# Altium PCB testDEOP.PcbDoc
Units mm, origin at the board's own origin, x right, y up, seen from the top; angles counter-clockwise.
Board outline 40 x 40 mm, 4 copper layers (Top Layer, Middle Layer, GND, Bottom Layer), stack 0.603 mm thick; 70 components, 53 nets, 255 pads, 132 vias.
Unrouted connection lines stored in the file: 1.
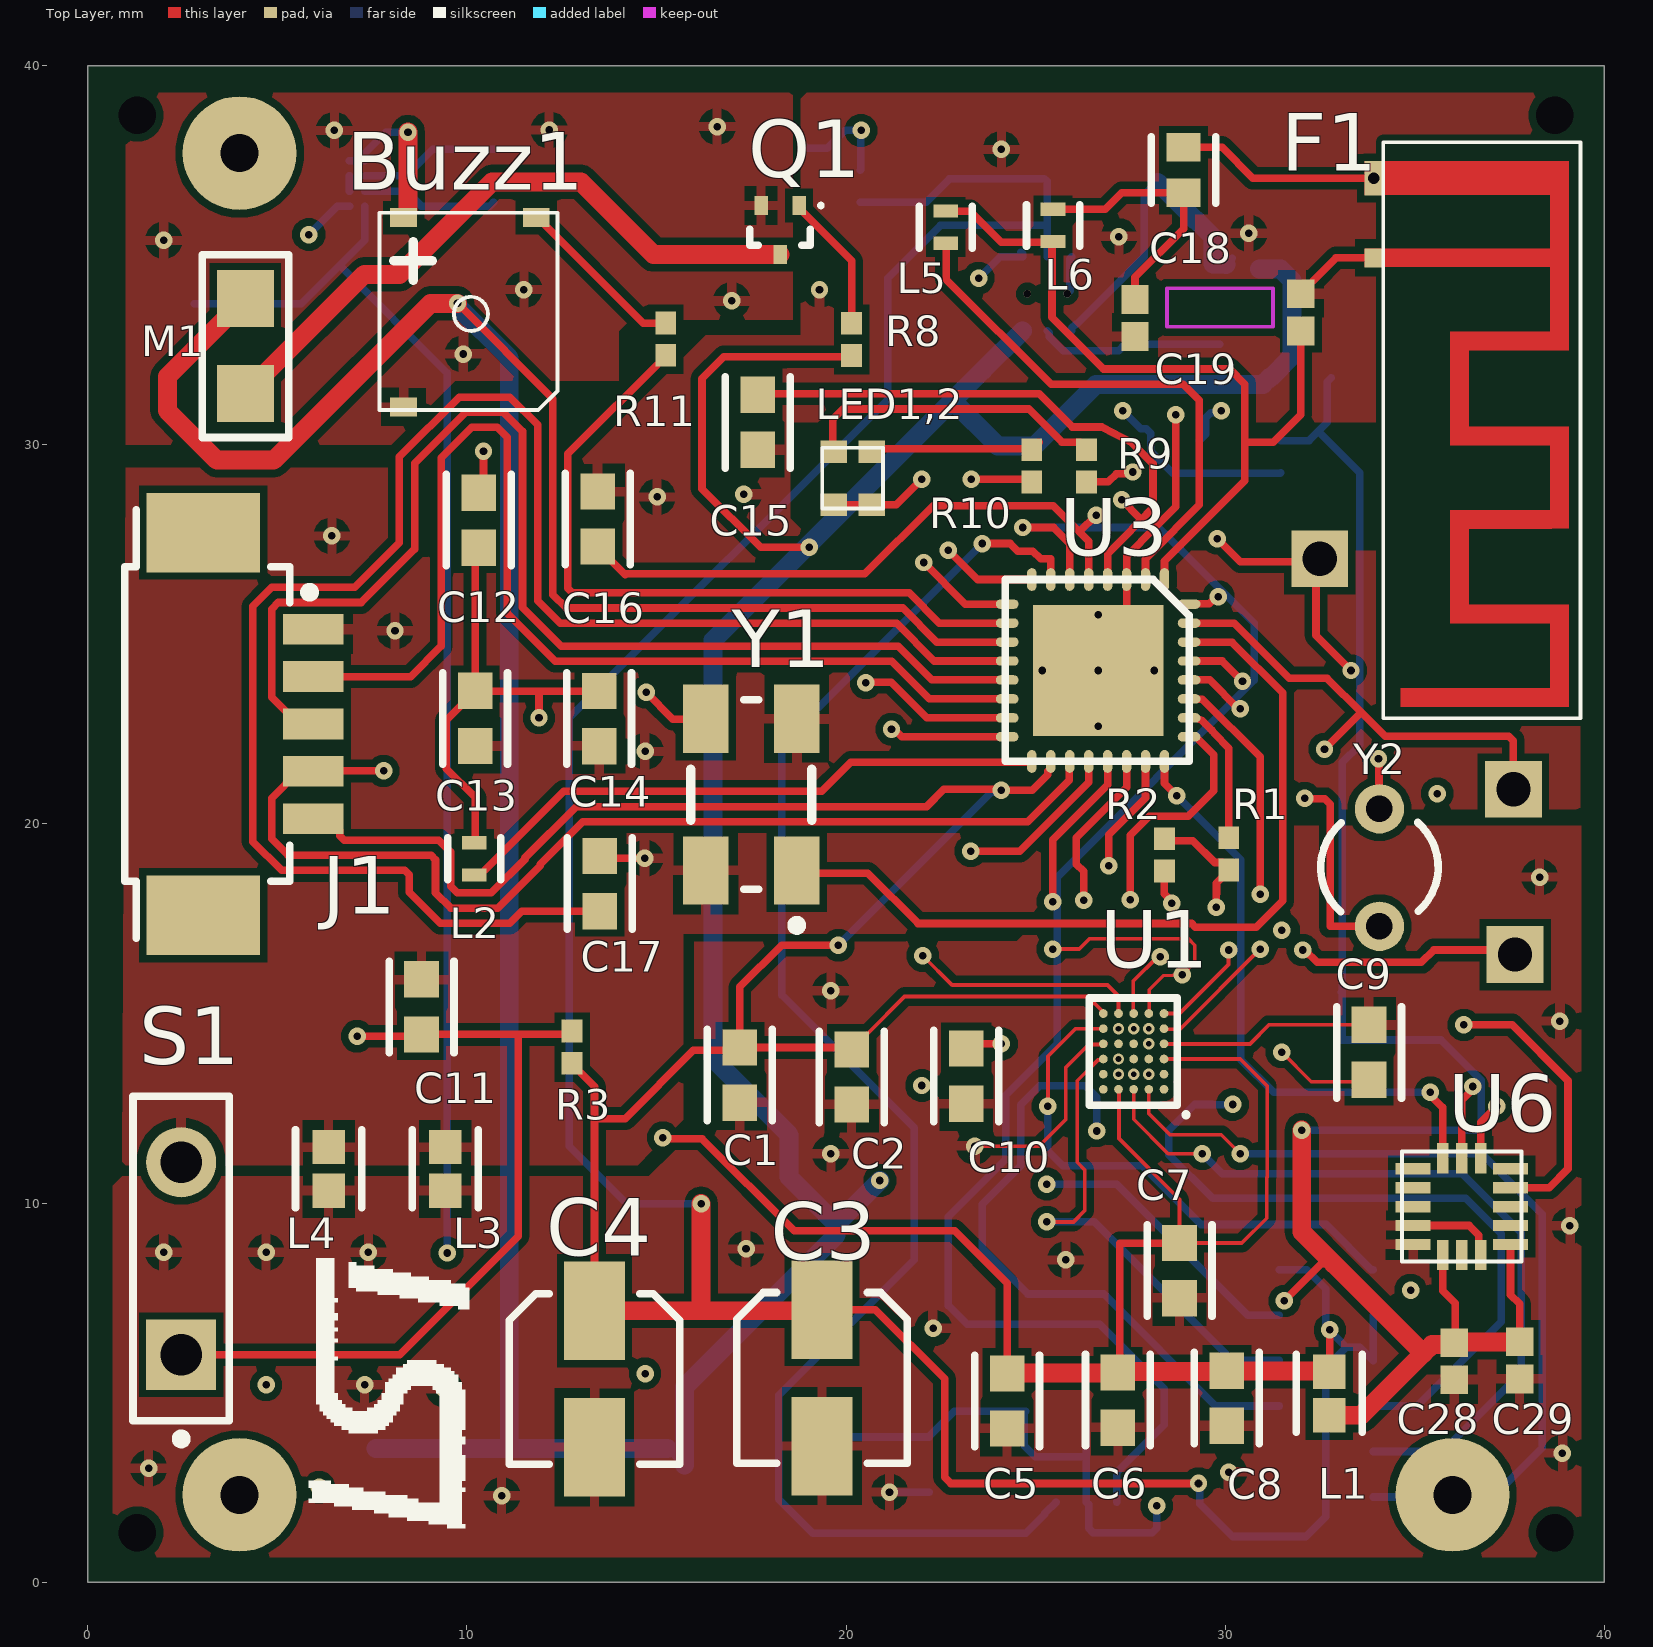
[diagram p0: Top Layer view]
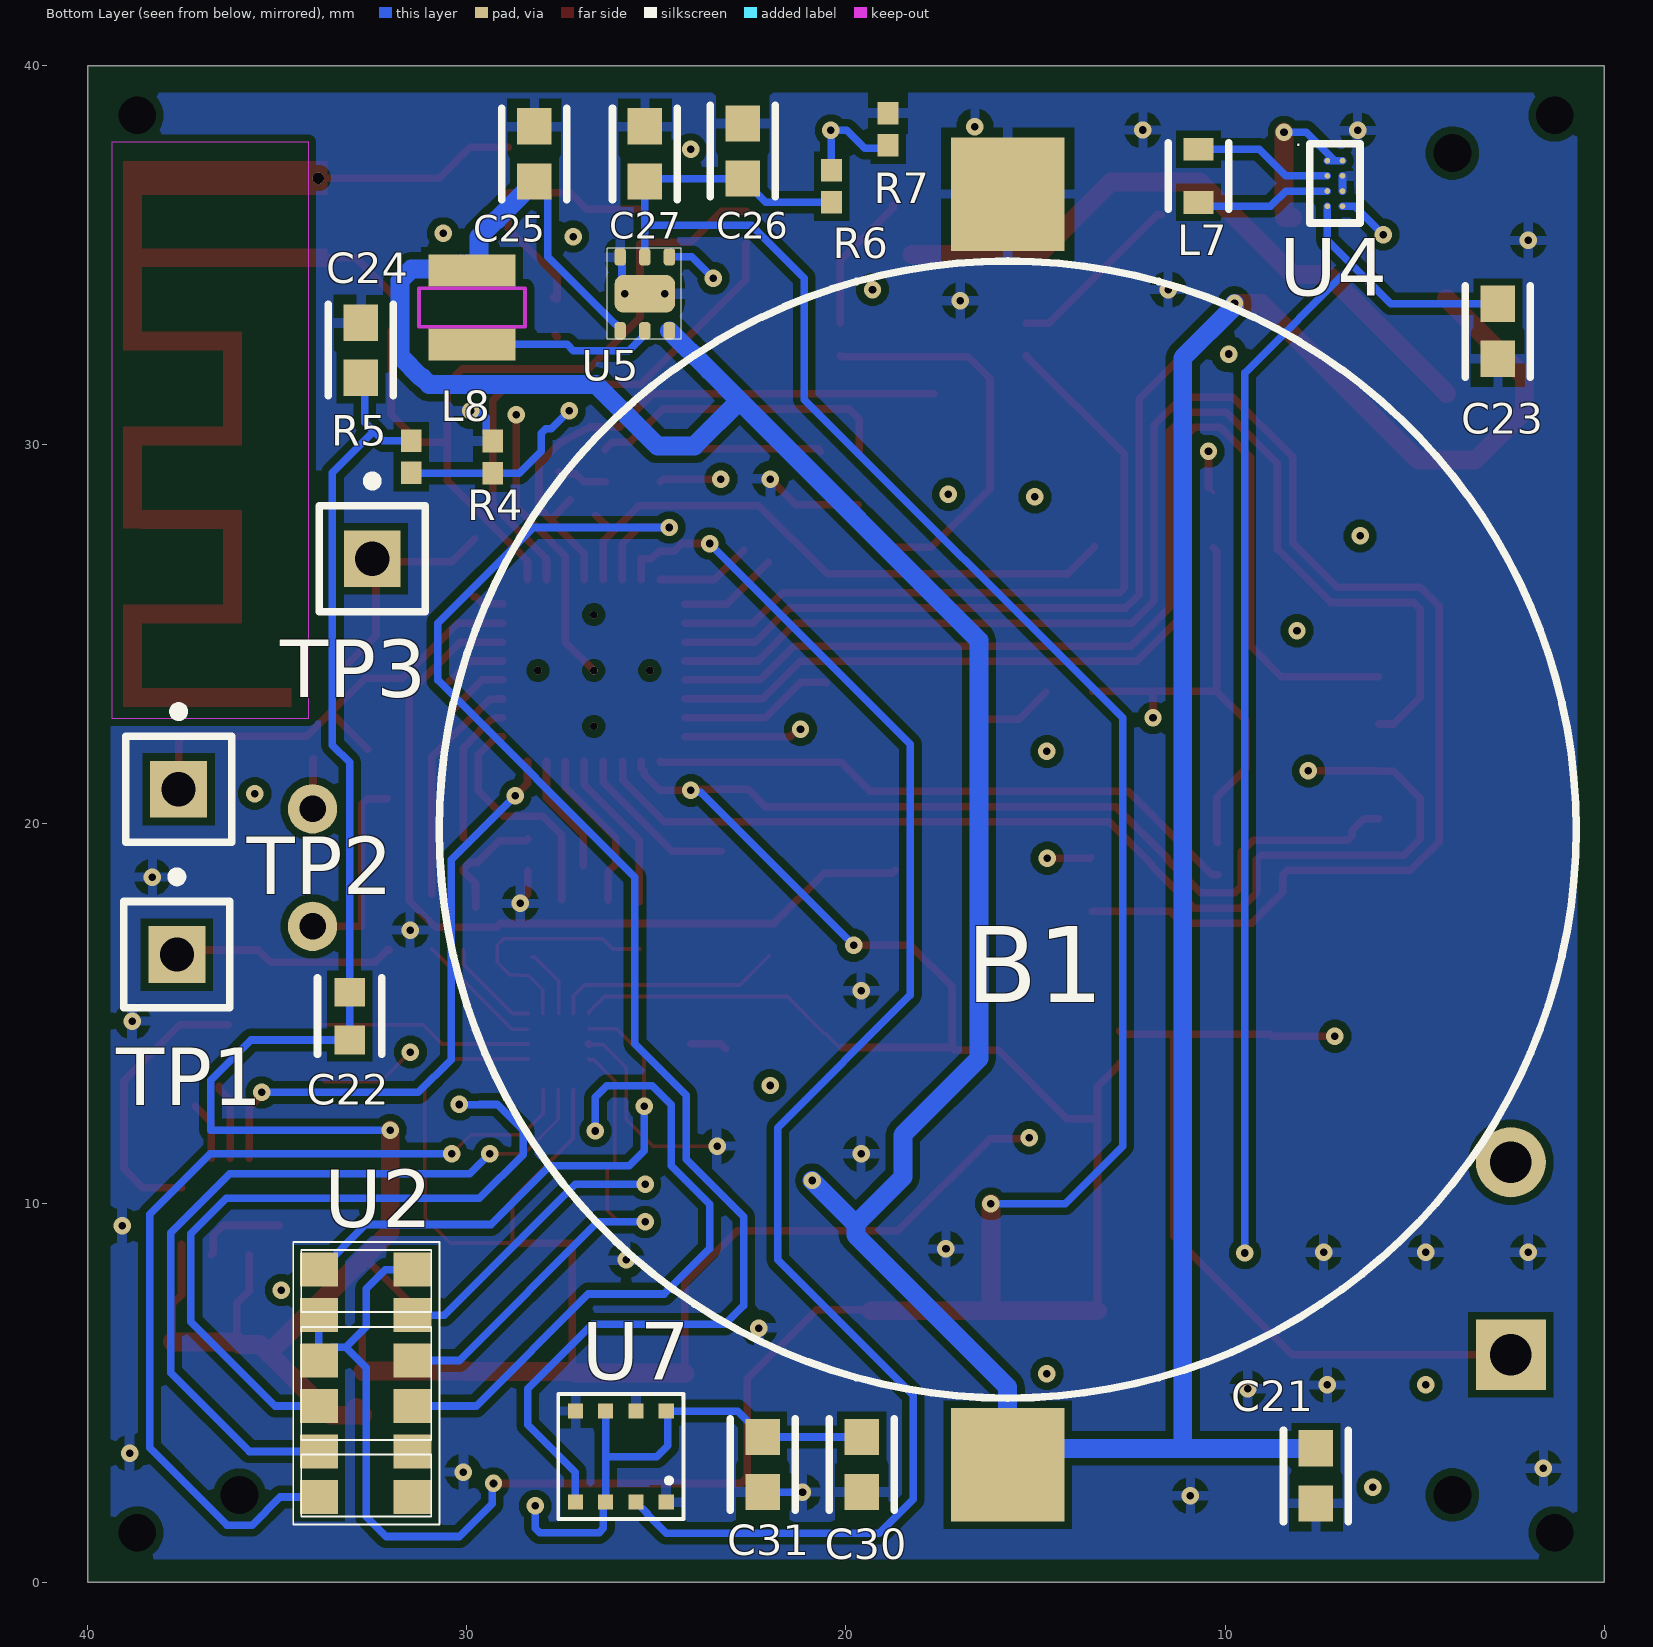
[diagram p1: Bottom Layer view, seen from below]
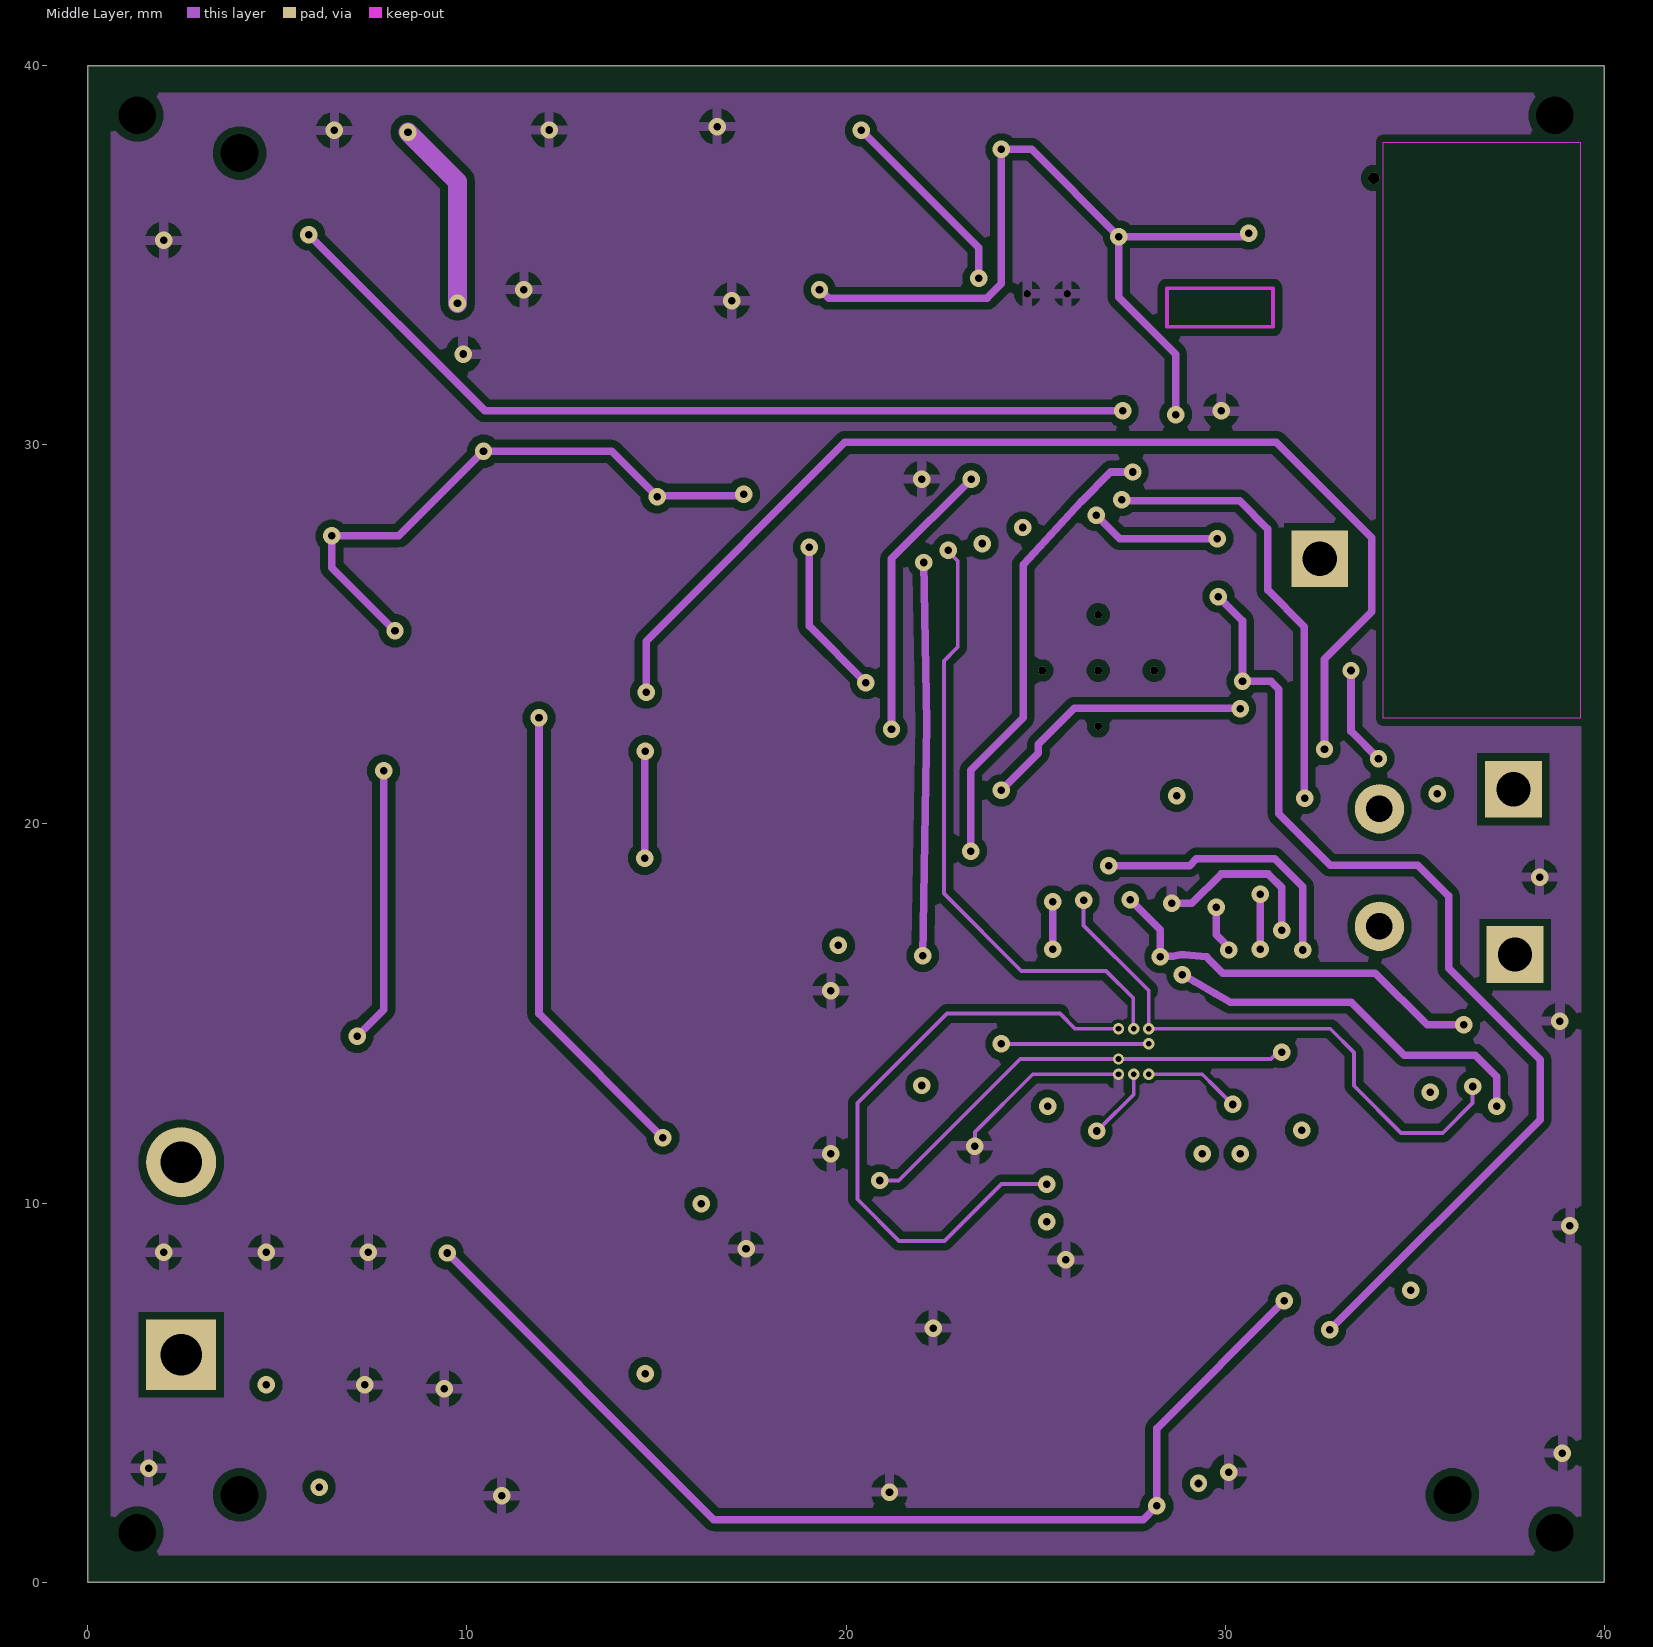
[diagram p2: Middle Layer]
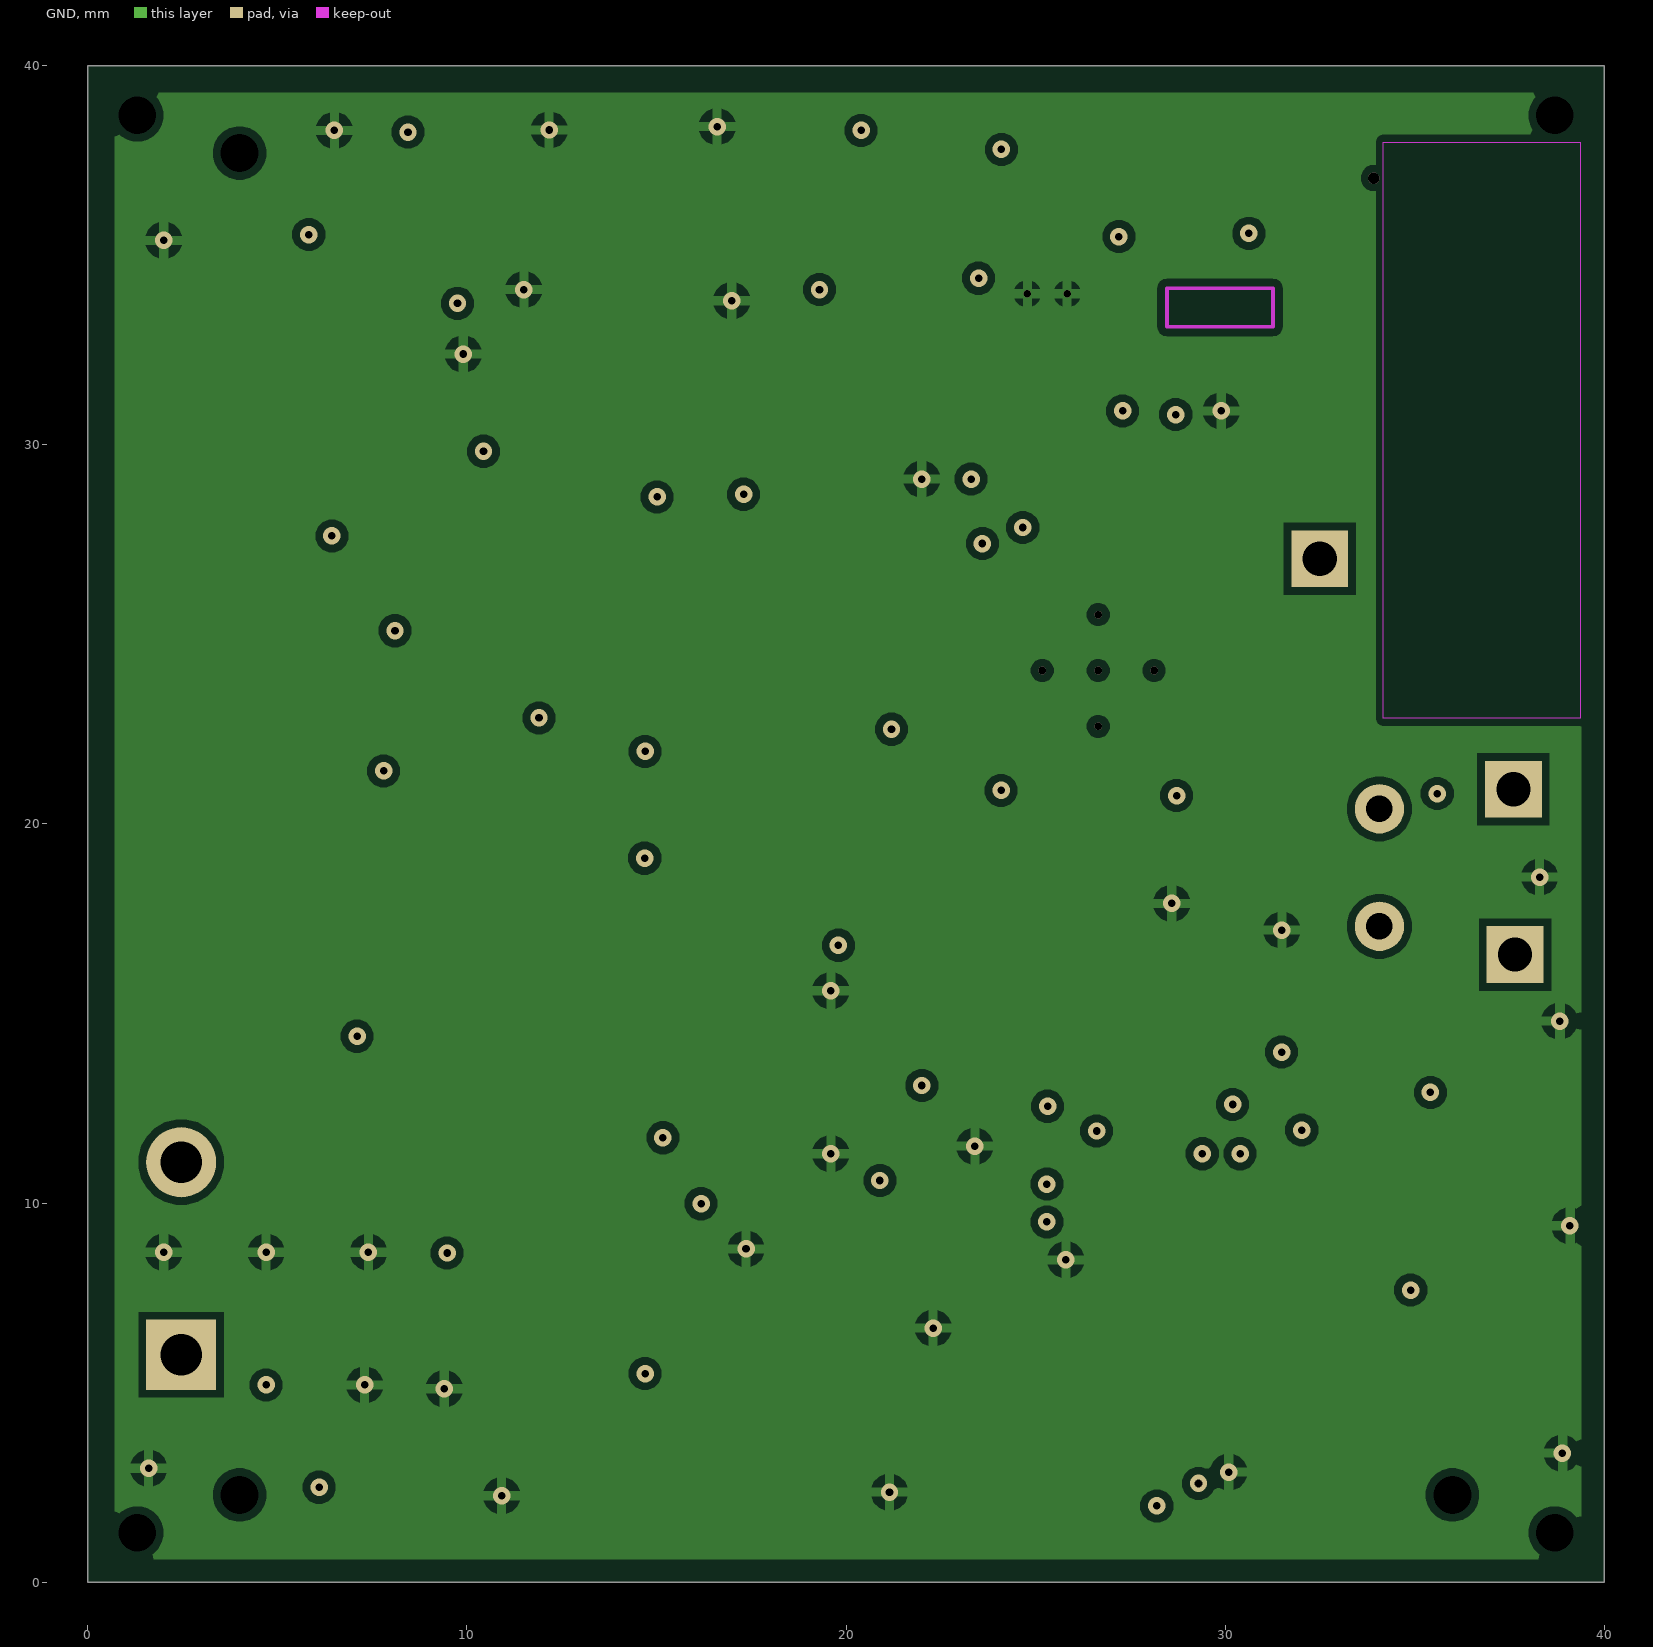
[diagram p3: GND]
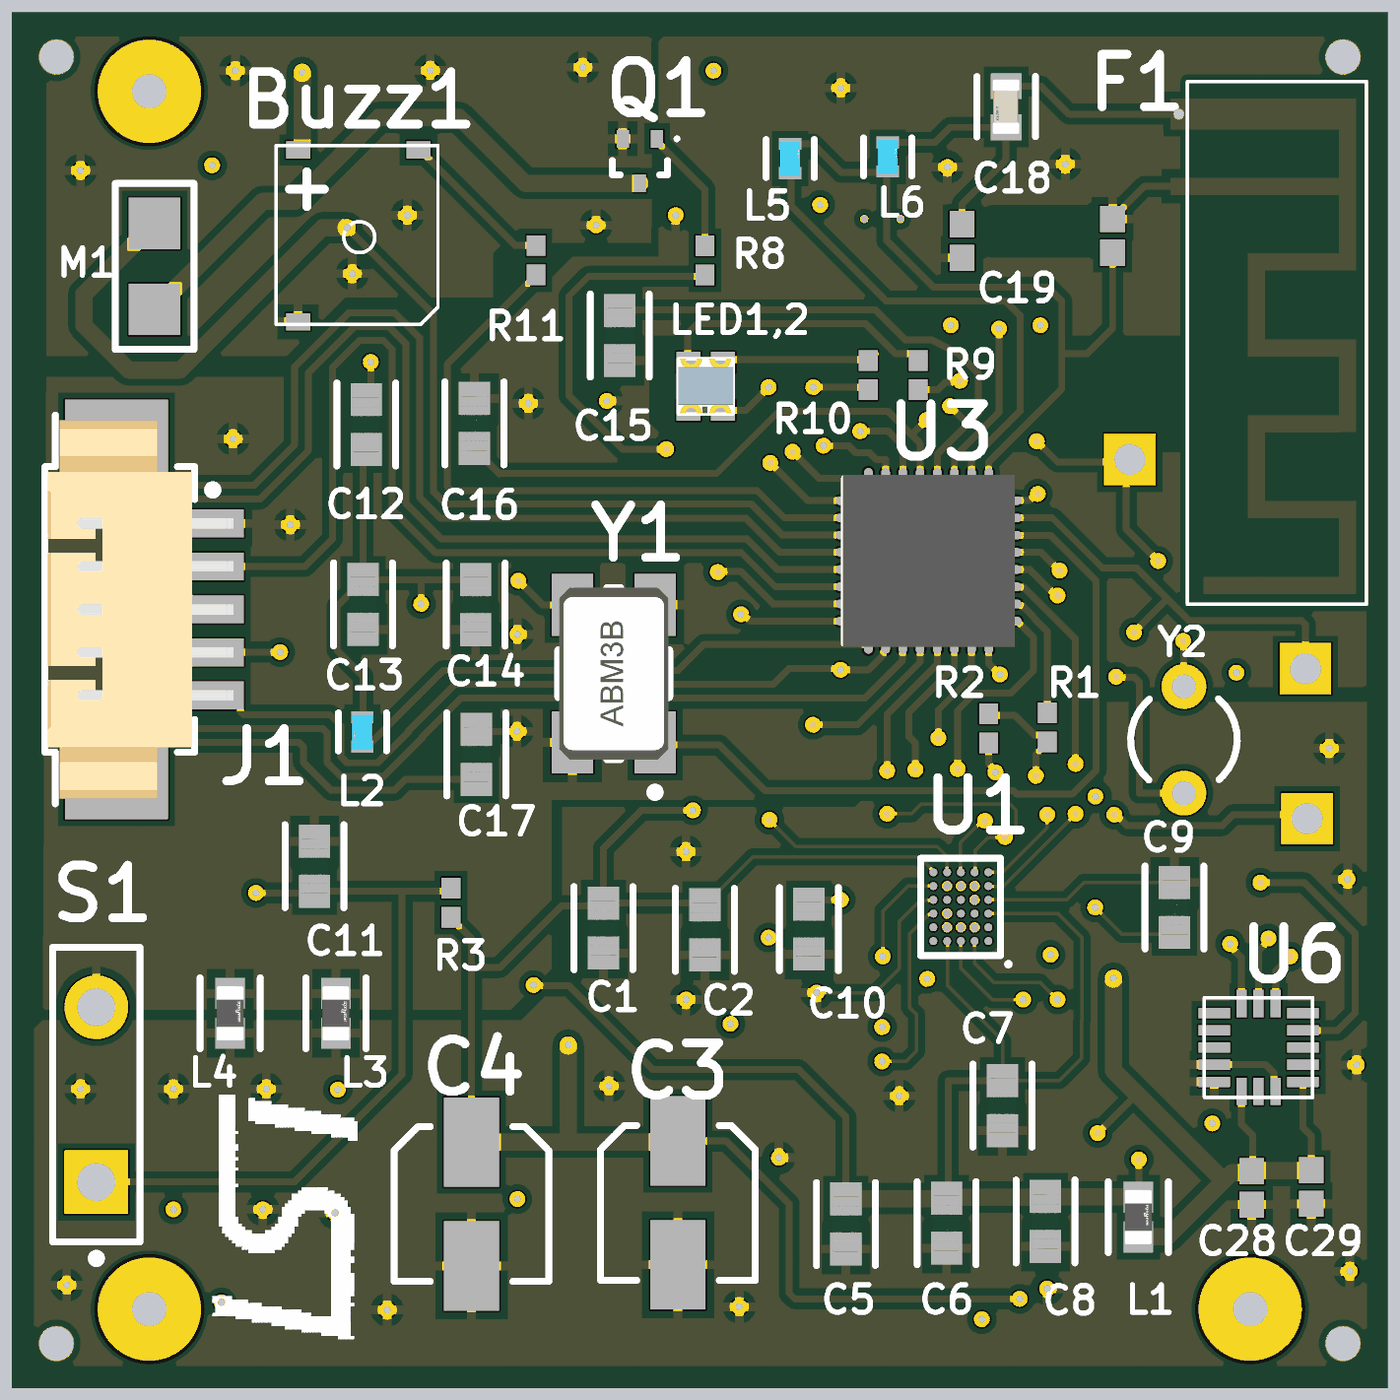
[diagram p4: 3D render of the assembled board from above, using the file's embedded part models]
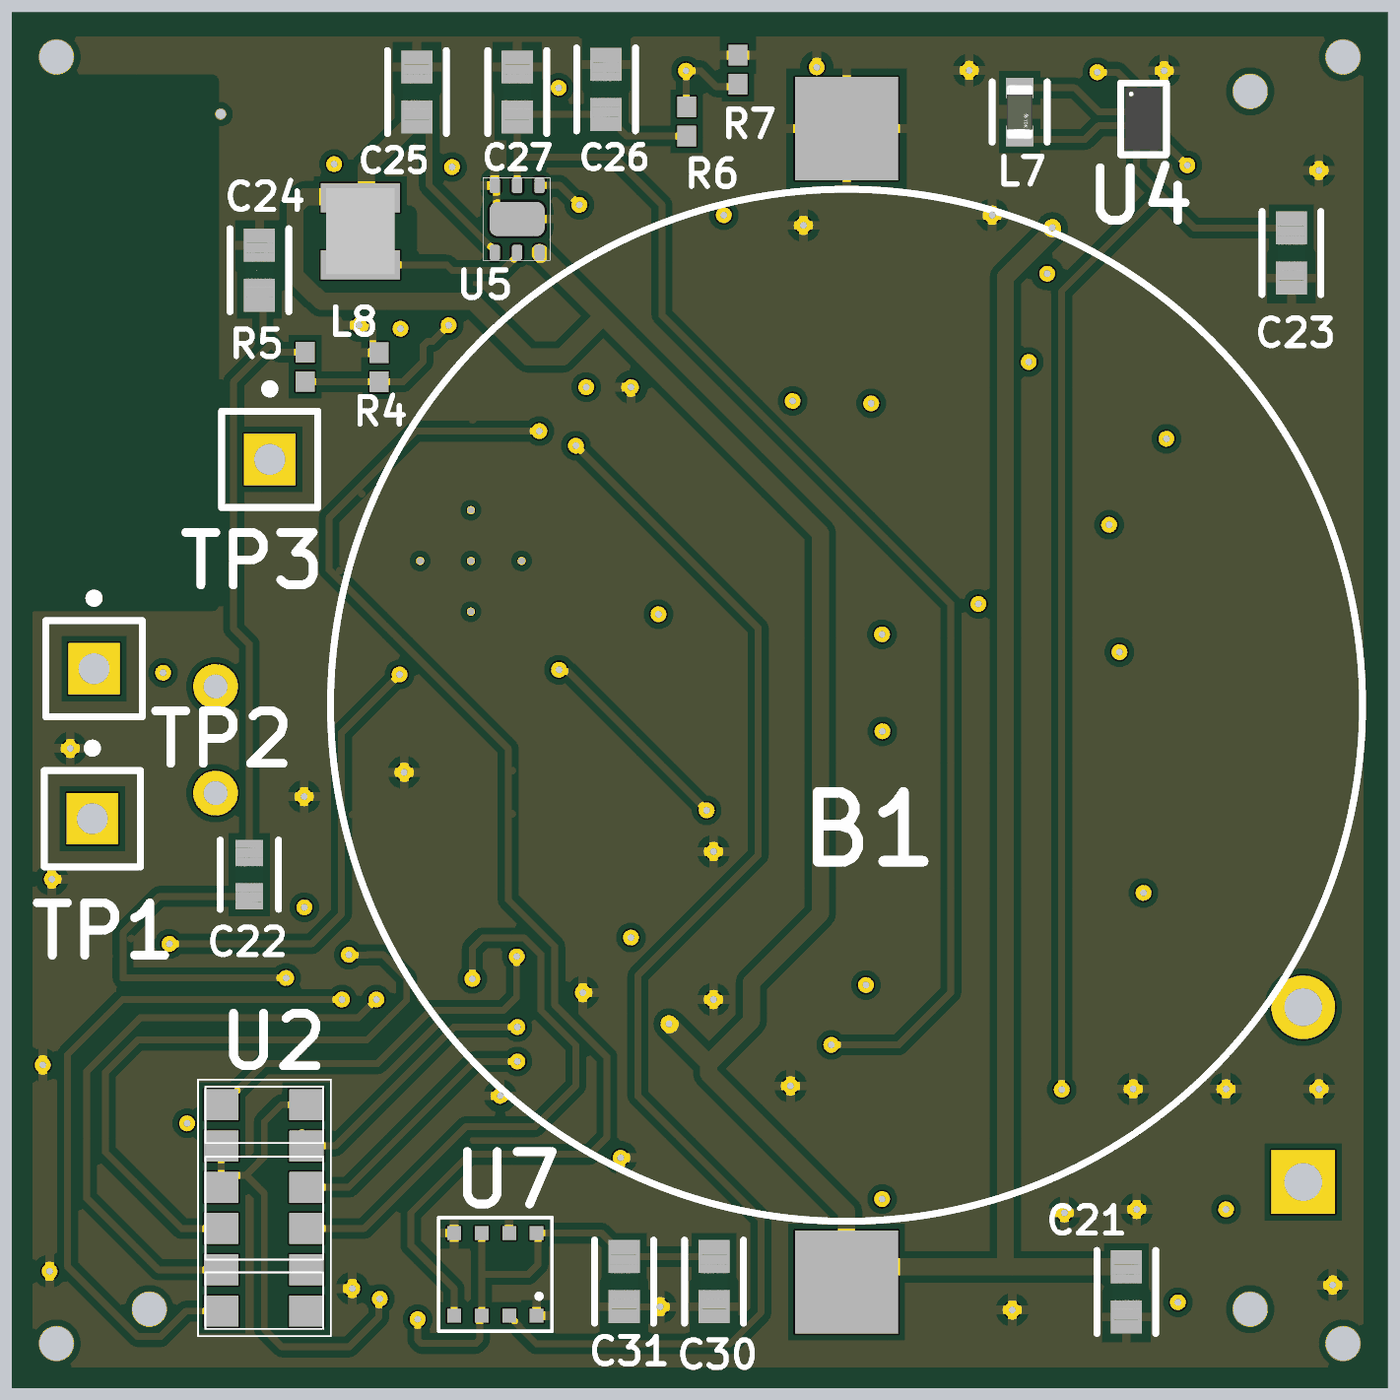
[diagram p5: 3D render of the assembled board from below, using the file's embedded part models]

## Layer stack, top to bottom
Top Solder: solder mask 0.0102, Solder Resist, Dk 3.5
Top Layer: signal copper 0.0356
Dielectric 2: prepreg 0.0711, PP-006, Dk 4.6
Middle Layer: signal copper 0.035
Dielectric 1: dielectric 0.32, FR-4, Dk 4.8
GND: signal copper 0.035
Dielectric 3: prepreg 0.0711, PP-006, Dk 4.6
Bottom Layer: signal copper 0.0356
Bottom Solder: solder mask 0.0102, Solder Resist, Dk 3.5

## Board outline
0,0 40,0 40,40 0,40

## Design rules (kind name [scope] priority, off if disabled: settings)
AcuteAngle [All] p1: minimum=6.00000000000000E+0001 checktracksonly=FALSE
BoardOutlineClearance [All] p1 off: gap=0.254 ignorepadtopadclearanceinfootprint=FALSE
Clearance Clearance_Antena [WithinRoom('Antena') vs WithinRoom('Antena')] p1: gap=0 ignorepadtopadclearanceinfootprint=TRUE
Clearance Clearance_AFE [WithinRoom('Exception_AFE')] p2: gap=0.1 ignorepadtopadclearanceinfootprint=TRUE
Clearance [All] p3: gap=0.2 ignorepadtopadclearanceinfootprint=TRUE
DiffPairsRouting [All] p1: maxlimit=3.8 minlimit=0.09 mostfreqgap=0.09 toplayer_minwidth=0.2 toplayer_maxwidth=3.8 toplayer_prefwidth=0.2 midlayer1_minwidth=0.2 midlayer1_maxwidth=3.8 midlayer1_prefwidth=0.2 midlayer2_minwidth=0.2 midlayer2_maxwidth=3.8 midlayer2_prefwidth=0.2 bottomlayer_minwidth=0.2 bottomlayer_maxwidth=3.8 bottomlayer_prefwidth=0.2 maxuncoupledlength=12.7
HoleSize HoleSize_AFE [WithinRoom('Exception_AFE')] p1: absolutevalues=TRUE maxlimit=2.54 minlimit=0.15 maxpercent=80.000 minpercent=20.000
HoleSize [All] p2: absolutevalues=TRUE maxlimit=6.3 minlimit=0.2 maxpercent=80.000 minpercent=20.000
HoleToHoleClearance HoleToHoleClearance_1 [WithinRoom('Exception_AFE') vs WithinRoom('Exception_AFE')] p1: gap=0.02 allowstackedmicrovias=TRUE
HoleToHoleClearance [All] p2: gap=0.5 allowstackedmicrovias=TRUE
MinimumAnnularRing MinimumAnnularRing_AFE [WithinRoom('Exception_AFE')] p1: minimumring=0.07
MinimumAnnularRing [All] p2: minimumring=0.13
MinimumSolderMaskSliver [All] p1: minsoldermaskwidth=0.01
NetAntennae NetAntennae_Antena [WithinRoom('Antena')] p1: netantennaetolerance=20
NetAntennae [All] p2: netantennaetolerance=0
PasteMaskExpansion [All] p1 off: expansion=0
PolygonConnect [All] p1: connectstyle=Relief reliefconductorwidth=0.254 reliefentries=4 polygonreliefangle="90 Angle" airgapwidth=0.254
RoomDefinition Antena [NOT All] p1: confinementstyle=ConfineIn formatcopy=TRUE lockcomponents=FALSE outline 28.6,36 34.8,36 34.8,38.6 28.6,38.6
RoomDefinition Exception_AFE [Not All] p2: confinementstyle=ConfineIn formatcopy=TRUE lockcomponents=FALSE outline 25.615,15.838 29.75,15.838 29.75,11.975 25.615,11.975
RoutingCorners [All] p1 off: cornerstyle=45-Degree minsetback=2.54 maxsetback=2.54
RoutingVias RoutingVias_AFE [WithinRoom('Exception_AFE')] p1: holewidth=0.15 width=1.27 viastyle="Through Hole" minholewidth=0.02 minwidth=0.05 maxholewidth=2 maxwidth=2
RoutingVias [All] p2: holewidth=0.2 width=0.4 viastyle="Through Hole" minholewidth=0.2 minwidth=0.4 maxholewidth=6.35 maxwidth=6.35
ShortCircuit ShortCircuit_aNTENA [WithinRoom('Antena') vs WithinRoom('Antena')] p1: allowed=TRUE
ShortCircuit [All] p2: allowed=FALSE
SilkToSilkClearance [All] p1: silktosilkclearance=0.15
SilkToSolderMaskClearance [IsPad] p1: minsilkscreentomaskgap=0 clearancetoexposedcopper=TRUE
SolderMaskExpansion [All] p1: expansion=0.05 istentingtop=FALSE
UnRoutedNet [All] p1: checkbadconnections=TRUE
Width With_AFE [WithinRoom('Exception_AFE')] p1: maxlimit=0.4 minlimit=0.1 preferedwidth=0.2 toplayer_prefwidth=0.1 midlayer1_prefwidth=0.1 midlayer2_minwidth=0.2 bottomlayer_minwidth=0.2 minimp=50.000000 maximp=50.000000 favimp=50.000000
Width Ancho_SIGNAL [InNetClass('SIGNAL')] p2: maxlimit=2 minlimit=0.2 preferedwidth=0.2
Width Ancho_PWR [InNetClass('POWER')] p3: maxlimit=2 minlimit=0.5 preferedwidth=0.5
Width [All] p4: maxlimit=0.5 minlimit=0.1 preferedwidth=0.2 toplayer_prefwidth=0.1 midlayer1_prefwidth=0.1 midlayer2_minwidth=0.2 bottomlayer_minwidth=0.2 minimp=50.000000 maximp=50.000000 favimp=50.000000
19 further rules are at their usual default settings.

## Classes and differential pairs
component class "Sensor temperatura y humedad": C30 C31 U7
component class "Sensor BIO": C1 C2 C3 C4 C5 C6 C7 C8 C9 C10 L1 R1 R2 U2
component class Main: C11 C12 C13 C14 C15 C16 C17 J1 L2 L3 L4 R3 S1 TP1 TP2 TP3 U3 Y1
component class Designator: Buzz1 LED1,2 M1 Q1 R8 R9 R10 R11
component class Alimentación: B1 C21 C22 C23 C24 C25 C26 C27 L7 L8 R4 R5 R6 R7 U4 U5
component class Acelerómetro: C28 C29 U6

## Components (designator, comment, footprint, x,y, rotation, side; value= is the part's Value field where it differs from the comment)
B1 "CR3032" CR3032 15.733,19.854 r90 bottom
Buzz1 "Surface_Mount_Buzzer" buzzer 8.325,36 r270 top
C1 "1000pF" FP-CL10-IPC_B 17.2,13.375 r270 top
C2 "0.1µF" FP-CL10-IPC_B 20.15,13.325 r270 top
C3 "22µF" NIC-CAPA2-4X5.8_V 19.367,5.388 r270 top
C4 "22µF" NIC-CAPA2-4X5.8_V 13.365,5.357 r270 top
C5 "0.1µF" FP-CL10-IPC_B 24.25,4.775 r270 top
C6 "10µF" FP-CL10-IPC_B 27.175,4.8 r270 top
C7 "1000pF" FP-CL10-IPC_B 28.8,8.216 r270 top
C8 "0.1µF" FP-CL10-IPC_B 30.05,4.85 r270 top
C9 "0.1µF" FP-CL10-IPC_B 33.8,13.975 r90 top
C10 "0.1µF" FP-CL10-IPC_B 23.175,13.348 r270 top
C11 "0.1µF" FP-CL10-IPC_B 8.8,15.175 r90 top
C12 "10µF" FP-CL10-IPC_B 10.307,28.016 r90 top
C13 "0.1µF" FP-CL10-IPC_B 10.212,22.787 r270 top
C14 "0.1µF" FP-CL10-IPC_B 13.485,22.781 r270 top
C15 "12pF" FP-CL10-IPC_B 17.675,30.6 r90 top
C16 "12pF" FP-CL10-IPC_B 13.45,28.048 r270 top
C17 "1µF" FP-CL10-IPC_B 13.505,18.426 r90 top
C18 "12pF" FP-C0603C-CF-MFG 28.906,37.254 r90 top value="12 pF"
C19 "1.2pF" CAPC1005X55X25ML05T10 27.625,33.35 r90 top
C20 "1.2pF" CAPC1005X55X25ML05T10 32,33.5 r270 top
C21 "10µF" FP-CL10-IPC_B 7.6,2.8 r270 bottom
C22 "10nF" FP-CL10-IPC_C 33.094,14.93 r90 bottom
C23 "10µF" FP-CL10-IPC_B 2.8,33 r270 bottom
C24 "10µF" FP-CL10-IPC_B 32.8,32.5 r90 bottom
C25 "10µF" FP-CL10-IPC_B 28.222,37.681 r90 bottom
C26 "10µF" FP-CL10-IPC_B 22.723,37.757 r90 bottom
C27 "10µF" FP-CL10-IPC_B 25.305,37.681 r90 bottom
C28 "100nF" CAPC1005X55X25ML05T10 36.05,5.825 r90 top
C29 "100nF" CAPC1005X55X25ML05T10 37.775,5.85 r90 top
C30 "100nF" FP-CL10-IPC_B 19.585,3.1 r270 bottom
C31 "100nF" FP-CL10-IPC_B 22.2,3.1 r270 bottom
F1 "-" PCBAntenna 33.676,37.489 r270 top net-tie
J1 "653105131822" 653105131822 3.143,22.639 r270 top
L1 "1500Ω" FP-BLM18-0_15-t0_8-IPC_C 32.75,4.975 r90 top
L2 "10µH" FP-LQW15AN_00-W0_6-0_1-MFG 10.194,19.081 r270 top
L3 "1500Ω" FP-BLM18-0_15-t0_8-IPC_C 9.425,10.9 r90 top
L4 "1500Ω" FP-BLM18-0_15-t0_8-IPC_C 6.35,10.9 r90 top
L5 "15nH" FP-LQW15AN_00-W0_6-0_1-MFG 22.63,35.747 r90 top
L6 "2nH" FP-LQW15AN_00-W0_6-0_1-MFG 25.462,35.794 r90 top
L7 "1µH" FP-MLZ1608-MFG 10.7,37.1 r270 bottom value=1uH
L8 "2.2µH" "SMD 2508" 29.867,33.63 r270 bottom
LED1,2 "LEDs SMD" LED_SMD 19.225,28.025 r90 top
M1 "MOTOR" Motor 4.152,32.611 r270 top
Q1 "MMBT3904TT1G" ONSC-SC-75-3-463-01_V 18.26,35.673 r270 top
R1 "499kΩ" RESC1005X40X25NL05T10 30.1,19.209 r90 top
R2 "499kΩ" RESC1005X40X25NL05T10 28.4,19.184 r90 top
R3 "100kΩ" RESC1005X40X25NL05T10 12.771,14.113 r270 top
R4 "51.1kΩ" RESC1005X40X25NL05T10 29.321,29.682 r270 bottom
R5 "164kΩ" RESC1005X40X25NL05T10 31.471,29.69 r90 bottom
R6 "320kΩ" RESC1005X40X25NL05T10 20.381,36.827 r270 bottom
R7 "100kΩ" RESC1005X40X25NL05T10 18.892,38.33 r270 bottom
R8 "430Ω" RESC1005X40X25NL05T10 20.149,32.784 r90 top
R9 "430Ω" RESC1005X40X25NL05T10 26.35,29.45 r90 top
R10 "430Ω" RESC1005X40X25NL05T10 24.9,29.45 r90 top
R11 "110Ω" RESC1005X40X25NL05T10 15.242,32.793 r90 top
S1 "SW-PB" SPST-2 2.459,8.536 r90 top
TP1 "Test point" PIN1 37.656,16.556 r180 bottom
TP2 "Test point" PIN1 37.608,20.916 r180 bottom
TP3 "Test point" PIN1 32.5,27 r180 bottom
U1 "AFE4420 - DSBGA" "AFE4420 - DSBGA" 27.59,13.999 r180 top
U2 "" SFH7072 30.754,1.539 r90 bottom
U3 "CC2640R2FRHB" DEOP2021-Calle-Payno 28.403,26.451 r270 top
U4 "TPS63036" tps63036 7.1,36.9 r180 bottom
U5 "TSP61099-WSON" SOP6 25.96,33.015 r90 bottom
U6 "ADXL362" "ADXL362 - duplicate" 36.245,9.905 r180 top
U7 "BME680_Sen_4in1" BME_LGA8 25.941,3.31 r270 bottom
Y1 "24MHz" ABRA-ABM3B-4_V 17.5,20.775 r90 top
Y2 "32.768KHz" R38 34.075,18.85 r180 top

## Footprints (in the part's own frame and the unit in brackets; to place one, negate y for a bottom-side part, rotate by r counter-clockwise, add the part's x,y. Pads: shape width x height; smd on the part's side, far side on the other; paste and mask are expansions set on the pad)
653105131822 [mm] "1.25mm SMT Male Horizontal Shrouded Header, 5p"
  rect 0.81x1.6 smd: 1(-2.5,2.8) 2(-1.25,2.8) 3(0,2.8) 4(1.25,2.8) 5(2.5,2.8)
  rect 2.1x3 smd: MP1(-5.05,-0.1) MP2(5.05,-0.1)
  silkscreen extent -5.65,-2.17 5.65,2.82, body extent -5.5,-2.1 5.5,3.3, height 3.4
ABRA-ABM3B-4_V [mm] "SMD, 4-Leads, Body 5x3.2mm"
  rect 1.8x1.2 smd: 1(-2,-1.2) 2(2,-1.2) 3(2,1.2) 4(-2,1.2)
  silkscreen extent -3.57,-1.6 2.5,1.6, body extent -2.5,-1.59 2.5,1.59, height 1.13
"ADXL362 - duplicate" [mm]
  rect 0.925x0.3 smd: 1(-1.288,1) 2(-1.288,0.5) 3(-1.288,0) 4(-1.288,-0.5) 5(-1.288,-1) 9(1.288,-1) 10(1.288,-0.5) 11(1.288,0) 12(1.288,0.5) 13(1.288,1)
  rect 0.3x0.8 smd: 6(-0.5,-1.275) 7(0,-1.275) 8(0.5,-1.275) 14(0.5,1.275) 15(0,1.275) 16(-0.5,1.275)
  silkscreen extent -1.58,-1.45 1.58,1.45, body extent -1.63,-1.5 1.63,1.5, height 1.06
"AFE4420 - DSBGA" [mm]
  round 0.23 smd paste+0 mask+0.05: A1(-0.8,1)
  round 0.23 smd mask+0.05: A2(-0.4,1) A3(0,1) A4(0.4,1) A5(0.8,1) B1(-0.8,0.6) B2(-0.4,0.6) B3(0,0.6) B4(0.4,0.6) B5(0.8,0.6) C1(-0.8,0.2) C2(-0.4,0.2) C3(0,0.2) C4(0.4,0.2) C5(0.8,0.2) D1(-0.8,-0.2) D2(-0.4,-0.2) D3(0,-0.2) D4(0.4,-0.2) D5(0.8,-0.2) E1(-0.8,-0.6) E2(-0.4,-0.6) E3(0,-0.6) E4(0.4,-0.6) E5(0.8,-0.6) F1(-0.8,-1) F2(-0.4,-1) F3(0,-1) F4(0.4,-1) F5(0.8,-1)
  silkscreen extent -1.4,-1.41 1.17,1.69, body extent -1.02,-1.28 1.04,1.29, height 0.5
BME_LGA8 [mm] "LGA, 8-Leads, Body 3,00x3,00mmx0,93mm, Pitch 0,80mm"
  rect 0.4x0.4 smd: 1(1.2,1.2) 2(1.2,0.4) 3(1.2,-0.4) 4(1.2,-1.2) 5(-1.2,-1.2) 6(-1.2,-0.4) 7(-1.2,0.4) 8(-1.2,1.2)
  silkscreen extent -1.65,-1.65 1.65,1.65, body extent -1.7,-1.7 1.7,1.7, height 1.2
buzzer [mm]
  rect 0.5x0.7 smd: 1(0,0) 2(5,0) 3(0,3.5)
  silkscreen extent -0.13,-0.64 5.08,4.06, body extent -0.13,-0.64 5.08,4.06, height 2
CAPC1005X55X25ML05T10 [mm] "Chip Capacitor, 2-Leads, Body 1.00x0.50mm, IPC Low Density"
  rect 0.76x0.72 smd: 1(-0.49,0) 2(0.49,0)
  body extent -0.53,-0.28 0.53,0.27, height 0.55
CR3032 [mm]
  rect 3x3 smd: 1(-16.764,0) 2(16.764,0)
  silkscreen extent -15,-15 15,15, body extent -15,-15 15,15, height 0.25
DEOP2021-Calle-Payno [mm]
  oval 0.6x0.25 smd mask+0.07: 1(0,0) 2(0,-0.5) 3(0,-1) 4(0,-1.5) 5(0,-2) 6(0,-2.5) 7(0,-3) 8(0,-3.5) 17(4.8,-3.5) 18(4.8,-3) 19(4.8,-2.5) 20(4.8,-2) 21(4.8,-1.5) 22(4.8,-1) 23(4.8,-0.5) 24(4.8,0)
  oval 0.25x0.6 smd mask+0.07: 9(0.65,-4.15) 10(1.15,-4.15) 11(1.65,-4.15) 12(2.15,-4.15) 13(2.65,-4.15) 14(3.15,-4.15) 15(3.65,-4.15) 16(4.15,-4.15) 25(4.15,0.65) 26(3.65,0.65) 27(3.15,0.65) 28(2.65,0.65) 29(2.15,0.65) 30(1.65,0.65) 31(1.15,0.65) 32(0.65,0.65)
  rect 3.45x3.45 smd: 33(2.4,-1.75)
  silkscreen extent 0,-4.2 4.8,0.65, body extent -0.1,-4.25 4.9,0.75, height 1
FP-BLM18-0_15-t0_8-IPC_C [mm]
  rect 0.906x0.858 smd paste+0 mask+0: 1(-0.576,0) 2(0.576,0)
  silkscreen extent -1.03,-0.87 1.03,0.87, body extent -1.13,-0.58 1.13,0.58, height 0.25
FP-C0603C-CF-MFG [mm]
  rect 0.75x0.9 smd paste+0 mask+0: 1(-0.6,0) 2(0.6,0)
  silkscreen extent -0.87,-0.85 0.88,0.85, body extent -1.2,-0.6 1.2,0.6, height 0.25
FP-CL10-IPC_B [mm]
  rect 0.958x0.912 smd paste+0 mask+0: 1(-0.727,0) 2(0.727,0)
  silkscreen extent -1.21,-0.86 1.21,0.86, body extent -1.46,-0.71 1.46,0.71, height 0.25
FP-CL10-IPC_C [mm]
  rect 0.758x0.812 smd paste+0 mask+0: 1(-0.627,0) 2(0.627,0)
  silkscreen extent -1.01,-0.85 1.01,0.85, body extent -0.8,-0.4 0.8,0.4, height 0.9
FP-LQW15AN_00-W0_6-0_1-MFG [mm]
  rect 0.35x0.65 smd paste+0 mask+0: 1(-0.425,0) 2(0.425,0)
  silkscreen extent -0.55,-0.7 0.55,0.7, body extent -0.7,-0.45 0.7,0.45, height 0.25
FP-MLZ1608-MFG [mm]
  rect 0.6x0.8 smd paste+0 mask+0: 1(-0.7,0) 2(0.7,0)
  silkscreen extent -0.87,-0.8 0.87,0.8, body extent -0.8,-0.4 0.8,0.4, height 0.95
LED_SMD [mm]
  rect 0.6x0.7 smd: 1(0.4,-1.45) 2(1.8,-1.45) 3(0.4,-0.45) 4(1.8,-0.45)
  silkscreen extent 0.3,-1.75 1.9,-0.15, body extent 0.31,-1.75 1.91,-0.15, height 0.7
Motor [mm]
  rect 1.5x1.5 smd: 1(-1.25,0) "2 +"(1.25,0)
  silkscreen extent -2.41,-1.14 2.41,1.14
NIC-CAPA2-4X5.8_V [mm] "Aluminum Electrolytic Capacitor, Diameter 4mm, Height 6.1mm, Pitch 3.6mm"
  rect 2.6x1.6 smd: 1(-1.8,0) 2(1.8,0)
  silkscreen extent -2.25,-2.25 2.25,2.25, body extent -2,-1.98 2,2, height 6.1
ONSC-SC-75-3-463-01_V [mil] "SOT23, 3-Leads, Body 1.6x0.8mm, Pitch 0.5mm"
  rect 20x14.02 smd: 1(-25.49,19.68) 2(-25.49,-19.69) 3(25.49,0)
  silkscreen extent -27,-31 16,44, body extent -16,-31 16,31, height 35
PCBAntenna [mm]
  rect 0.5x0.5 smd paste-0.25 mask+0: 1(2.55,0.25)
  rect 0.9x0.5 smd paste-0.45 mask+0: 2(0.45,0.25)
  Top Layer region: -0.002,-0.001 0.898,-0.001 0.898,4.952 -0.002,4.952
  Top Layer region: 2.298,-0.001 2.798,-0.001 2.798,4.952 2.298,4.952
  Top Layer region: 11.701,4.898 14.401,4.898 14.401,5.398 11.701,5.398
  Top Layer region: 11.701,2.258 12.201,2.258 12.201,4.951 11.701,4.951
  Top Layer region: 9.65,2.259 11.809,2.259 11.809,2.759 9.65,2.759
  Top Layer region: 9.201,2.258 9.701,2.258 9.701,4.951 9.201,4.951
  Top Layer region: 6.998,4.899 9.698,4.899 9.698,5.399 6.998,5.399
  Top Layer region: 6.998,2.259 7.498,2.259 7.498,4.952 6.998,4.952
  Top Layer region: 4.951,2.259 7.11,2.259 7.11,2.759 4.951,2.759
  Top Layer region: 4.498,2.259 4.998,2.259 4.998,4.952 4.498,4.952
  Top Layer region: -0.002,4.899 4.998,4.899 4.998,5.399 -0.002,5.399
  Top Layer region: 13.9,0.96 14.4,0.96 14.4,4.953 13.9,4.953
  Keep-Out Layer region: -0.5,0.5 -0.5,5.7 14.7,5.7 14.7,0.5
  silkscreen extent -0.5,0.5 14.7,5.7
PIN1 [mm] "Connector; Plug"
  rect 1.5x1.5 hole 0.9: 1(0,0)
  silkscreen extent -1.4,-1.4 1.4,2.17
R38 [mm] "Crystal, Thru-Hole; 2 Leads; Body 3.1 x 8.2 mm (Dia.xH)"
  round 1.3 hole 0.7: 1(0,1.55) 2(0,-1.55)
  silkscreen extent -1.55,-1.19 1.55,1.17
RESC1005X40X25NL05T10 [mm] "Chip Resistor, 2-Leads, Body 1.00x0.50mm, IPC Medium Density"
  rect 0.6x0.55 smd: 1(-0.425,0) 2(0.425,0)
  body extent -0.53,-0.27 0.53,0.28, height 0.4
SFH7072 [mm]
  rect 0.9x1 smd: 1(0.705,3.155) 2(1.905,3.155) 3(3.105,3.155) 4(4.305,3.155) 5(5.505,3.155) 6(6.705,3.155) 7(6.705,0.679) 8(5.505,0.679) 9(4.305,0.679) 10(3.105,0.679) 11(1.905,0.679) 12(0.705,0.679)
  silkscreen extent -0.02,-0.03 7.44,3.83, body extent -0.01,-1.83 7.44,5.63, height 0.9
"SMD 2508" [mm] "Chip Inductor, 2-Leads, Body 2.5x2.0mm, IPC Medium Density"
  rect 0.85x2.3 smd: 1(-0.975,0) 2(0.975,0)
  Keep-Out Layer lines w0.1: 0.508,1.397 0.508,-1.397 -0.508,-1.397 -0.508,1.397 0.508,1.397
  body extent -1.25,-1 1.25,1, height 0.8
SOP6 [mm]
  rrect50% 0.45x0.3 smd mask+0.07: 1(0,0) 2(0,-0.65) 3(0,-1.3) 4(1.95,-1.3) 5(1.95,-0.65) 6(1.95,0)
  rrect50% 1x1.6 smd mask+0.07: 7(0.975,-0.65)
  silkscreen extent -0.23,-1.61 2.17,0.34, body extent -0.22,-1.61 2.17,0.34, height 0.8
SPST-2 [mm] "Switch; 2 Leads"
  rect 1.85x1.85 hole 1.1: 1(-2.54,0)
  round 1.85 hole 1.1: 2(2.54,0)
  silkscreen extent -4.89,-1.27 4.28,1.27
tps63036 [mm]
  round 0.15 smd: A1(-0.2,0.6) A2(0.2,0.6) B1(-0.2,0.2) B2(0.2,0.2) C1(-0.2,-0.2) C2(0.2,-0.2) D1(-0.2,-0.6) D2(0.2,-0.6)
  silkscreen extent -0.66,-1.04 0.66,1.04, body extent -0.54,-0.91 0.54,0.9, height 0.63

## Part data
C1 C2 C5 C6 C7 C8 C9 C10 C11 C12 C13 C14 C15 C16 C17 C21 C23 C24 C25 C26 C27 C30 C31: library part CMP-13271-003245-1, "Cap Ceramic 10uF 10V X5R ±10% Pad SMD 0603 +85°C T/R", Capacitance=10uF, Case/Package=0603, Dielectric=X5R, Max Operating Temperature=85°C, Min Operating Temperature=-55°C, Package Quantity=10000, Tolerance=10%, Voltage Rating=10V, Depth=0.8mm, Height=0.8mm, Lead Free="Lead Free", Length=1.6mm, Mount="Surface Mount", Packaging="Tape and Reel", Radiation Hardening=No, Thickness=0.035inch, Voltage Rating (DC)=10V, Width=0.031inch
C3 C4: library part CMP-0687-00010-1, "Aluminum Electrolytic Capacitor, UD Series, Low Impedance, 22 uF, 10 V, + / - 20%, -55 to 105 degC, Chip Type, 4 x 5.8 mm D x L, Pb-Free, Reel", Manufacturer=Nichicon, PartNumber=UUD1A220MCL1GS, Rated Capacitance="22 uF", Rated Ripple Current (at 100kHz)="80 mA", Rated Voltage="10 V", Tolerance Rated Capacitance="-20 to 20%", ComponentLink1Description="Manufacturer URL", ComponentLink1URL=http://www.nichicon.co.jp/, ComponentLink2Description=Datasheet, ComponentLink2URL=http://products.nichicon.co.jp/en/pdf/XJA043/e-ud.pdf, ComponentLink3Description="Package Specification", ComponentLink3URL=http://products.nichicon.co.jp/en/pdf/XJA043/e-ud.pdf, DatasheetVersion=08/2012, Diameter="4 mm", Endurance Time="2000 h", Impedance="1.8 Ohm", Length="5.8 mm", Mounting Technology="Surface Mount", PackageDescription="2-Pin Surface Mount Device, Diameter 4 mm, Height 5.8 mm, Pitch 3.6 mm", PackageReference=CAPAE-D4H5.8, Packing="Dia382mm Reel", RoHS=TRUE
C18: library part CMP-1035-00616-2, "CAP CER 12PF 50V NP0 0603", Capacitance="12 pF", Manufacturer=KEMET, Manufacturer Part Number=C0603C120D5GACTU, Package=C0603C-CF, Temperature="-55°C to +125°C", Temperature Characteristic=C0G, Temperature Coefficient=30ppm/°C, Temperature Range High=+125°C, Temperature Range Low=-55°C, Tolerance="0.5 pF", Voltage Rating="50 V", Automotive=Yes, Automotive Grade="Grade 1", Category=Cap, ComponentLink2Description=Datasheet, ComponentLink2URL=https://api.kemet.com/component-edge/download/datasheet/C0603C100J5GACAUTO.pdf, Device Class L1="Passive Components", Device Class L2=Capacitors, Device Class L3="Ceramic Capacitors", Digikey Description="CAP CER 12PF 50V NP0 0603", Height=0.87mm, Lead Free=Yes, Material=Ceramic, Mouser Description="Multilayer Ceramic Capacitors MLCC - SMD/SMT 50volts 12pF C0G 0.5%", Octopart=https://octopart.com/c0603c120d5gactu-kemet-9143898, RoHS=TRUE
C19 C20 C28 C29: library part CMP-2008-04279-1, Manufacturer=Murata, Part Number=GRM1555C1H1R2BA01D
C22: library part CMP-13271-000193-1, "Cap Ceramic 10nF 50V X7R ±20% Pad SMD 0603 +125°C T/R", Case Code (Imperial)=0603, Case Code (Metric)=1608, Dielectric=X7R, Max Operating Temperature=125°C, Min Operating Temperature=-55°C, Package Quantity=4000, Tolerance=20%, Voltage Rating=50V, Capacitance=10nF, Case/Package=0603, Depth=0.8mm, Height=0.8mm, Lead Free="Lead Free", Length=1.6mm, Mount="Surface Mount", Packaging="Tape and Reel", Radiation Hardening=No, Thickness=0.035inch, Voltage Rating (DC)=50V, Width=0.031inch
F1: library part PCBAntenna, "GND pin has a via to a GND plane that is not included in the footprint, but has to be included in the final PCB layout design."
J1: library part CMP-1502-00774-1, "Male Shrouded Header WR-WTB, SMT, Right Angled, pitch 1.25 mm, 1 x 5 position", Contact Resistance=20mOhm, Manufacturer="Wurth Elektronik", Operating Temperature=-40to85degC, Working Voltage=125VAC, Datasheet URL=https://katalog.we-online.de/em/datasheet/6531xx131822.pdf, Gender=Male, Manufacturer URL=http://www.we-online.de, Mounting Technology=SMT, Orientation=RightAngled, Package Reference=653105131822, Packaging=TapeandReel, Part Number=653105131822, Pitch=1.25mm, Position=1x5, Publisher=WurthElektronik
L1 L3 L4: library part CMP-0686-00368-3, "Chip Ferrite Bead, 0603, 1500Ω @ 100MHz, 0.5Ω, 25%, 500mA", Case Code (Imperial)=0603, Case Code (Metric)=1608, Current Rating=500mA, DC Resistance (DCR)=500mR, Max Operating Temperature=125°C, Min Operating Temperature=-55°C, Package Quantity=1, Test Frequency=100MHz, Tolerance=25%, Case/Package=0603, Core Material=Ferrite, DC Current=500mA, Depth=0.8mm, Height=0.8mm, Impedance=1.5kR, Lead Free="Lead Free", Length=1.6mm, Material=Ferrite, Max Current Rating=500mA, Max DC Current=500mA, Military Standard=Not, Number of Circuits=1, Number of Lines=1, Number of Pins=2, Packaging="Tape and Reel", Radiation Hardening=No, REACH SVHC="No SVHC", Termination=SMD/SMT, Width=0.8mm
L2: library part CMP-2000-06595-2, "Wire Wound RF Inductor 15nH ±5% 460mA 0.16Ω 0402 (1005)", Case Code (Imperial)=0402, Case Code (Metric)=1005, Current Rating=460mA, DC Resistance (DCR)=160mR, Inductance=15nH, Max Operating Temperature=125°C, Min Operating Temperature=-55°C, Package Quantity=10000, Resistor Type=Wirewound, Self Resonant Frequency=5GHz, Test Frequency=100MHz, Tolerance=5%, Case/Package=0402, Core Material=Air, DC Current=460mA, Depth=0.7mm, Height=0.5mm, Lead Free="Lead Free", Length=1mm, Max DC Current=460mA, Military Standard=Not, Mount="Surface Mount", Packaging="Tape and Reel", Q Factor=30, Radiation Hardening=No, Shielding=Unshielded, Termination=SMD/SMT, Weight=2.8E-05oz, Width=0.02inch
L5: library part CMP-2000-06595-2, "Wire Wound RF Inductor 15nH ±5% 460mA 0.16Ω 0402 (1005)", Case Code (Imperial)=0402, Case Code (Metric)=1005, Current Rating=460mA, DC Resistance (DCR)=160mR, Max Operating Temperature=125°C, Min Operating Temperature=-55°C, Package Quantity=10000, Resistor Type=Wirewound, Self Resonant Frequency=5GHz, Test Frequency=100MHz, Tolerance=5%, Case/Package=0402, Core Material=Air, DC Current=460mA, Depth=0.7mm, Height=0.5mm, Inductance=15nH, Lead Free="Lead Free", Length=1mm, Max DC Current=460mA, Military Standard=Not, Mount="Surface Mount", Packaging="Tape and Reel", Q Factor=30, Radiation Hardening=No, Shielding=Unshielded, Termination=SMD/SMT, Weight=2.8E-05oz, Width=0.02inch
L6: library part CMP-06042-008059-1, "Wire Wound RF Inductor 2.4nH ±0.1nH 850mA 0.05Ω 0402 (1005)", Case Code (Imperial)=0402, Case Code (Metric)=1005, Current=260mA, Current Rating=850mA, DC Resistance (DCR)=50mR, Inductance=2.4nH, Max Operating Temperature=125°C, Min Operating Temperature=-55°C, Package Quantity=10000, Resistor Type=Wirewound, Self Resonant Frequency=15GHz, Test Frequency=100MHz, Tolerance=2%, Case/Package=0402, Core Material=Air, DC Current=850mA, Depth=0.7mm, Height=0.5mm, Lead Free="Lead Free", Length=1mm, Max DC Current=850mA, Military Standard=Not, Mount="Surface Mount", Packaging="Tape and Reel", Q Factor=20, Radiation Hardening=No, REACH SVHC="No SVHC", Shielding=Unshielded, Termination=SMD/SMT, Weight=2.8E-05oz, Width=0.02inch
L7: library part CMP-08253-000001-1, "FIXED IND 1UH 600MA 150 MOHM SMD", Inductance=1uH, Manufacturer=TDK, Manufacturer Part Number=MLZ1608A1R0WT000, Package=MLZ1608, Saturation Current=190mA, Series Resistance=0.195Ω, Temperature="-55°C to +125°C", Temperature Range High=+125°C, Temperature Range Low=-55°C, Test Frequency=10MHz, Tolerance=20%, Automotive=No, Category=Ind, ComponentLink2Description=Datasheet, ComponentLink2URL=https://product.tdk.com/info/en/catalog/datasheets/inductor_commercial_decoupling_mlz1608_en.pdf, Composition=Multilayer, Core Material=Ferrite, Device Class L1="Passive Components", Device Class L2=Inductors, Device Class L3="Fixed Inductors", Digikey Description="FIXED IND 1UH 600MA 150 MOHM SMD", Height=0.95mm, Ipc Land Pattern Name=CAPC16080X80, Lead Free=Yes, Mouser Description="Inductor Power Shielded Multi-Layer 1uH 20% 10MHz Ferrite 0.19A 0.195Ohm DCR 0603 T/R", Octopart=https://octopart.com/mlz1608a1r0wt000-tdk-34829250, RoHS=TRUE, Shielding=true
L8: library part CMP-1411-00004-1, "Power Multilayer Inductor WE-MAPI, L=2.2µH", Inductance=2.2ÂµH, Manufacturer="Wuerth Elektronik", PartNumber=74438322022, ComponentLink1Description="Manufacturer URL", ComponentLink1URL=http://www.we-online.com, ComponentLink2Description=Datasheet, ComponentLink2URL=http://katalog.we-online.de/kataloge/eisos/media/pdf/74438322022.pdf, PackageReference="SMD 2508"
LED1,2: library part LED
Q1: library part CMP-1048-00420-1, "General Purpose Transistor, NPN Silicon, 3-Pin SC-75, Pb-Free, Tape and Reel", Manufacturer="On Semiconductor", ComponentLink1Description="Manufacturer URL", ComponentLink1URL=http://www.onsemi.com/, ComponentLink2Description=Datasheet, ComponentLink2URL=http://www.onsemi.cn/pub_link/Collateral/MMBT3904TT1-D.PDF, ComponentLink3Description="Package Specification", ComponentLink3URL=http://www.onsemi.com/pub_link/Collateral/463-01.PDF, DatasheetVersion="Rev. 5", fT Min (MHz)=300, IC Continuous (A)=0.2, Mounting Technology="Surface Mount", PackageDescription="3-Pin Small Outline Transistor, Body 1.6 x 0.8 mm, Pitch 0.5 mm", PackageReference=SC-75-3-463-01, PackageVersion="Rev. F, 07/2005", Packing="Tape and Reel", PartNumber=MMBT3904TT1G, Polarity=NPN, RoHS=TRUE
R1 R2 R3 R4 R5 R6 R7 R8 R9 R10 R11: library part CMP-2002-06462-1, Manufacturer=Panasonic, Part Number=ERJ-U02F1501X
S1: "Switch", LatestRevisionDate=17-Jul-2002, LatestRevisionNote="Re-released for DXP Platform.", PackageDescription="Switch; 2 Leads", PackageReference=SPST-2, Published=24-Mar-1999, Publisher="Altium Limited"
TP1 TP2 TP3: library part Socket, "Socket", LatestRevisionDate=17-Jul-2002, LatestRevisionNote="Re-released for DXP Platform.", Publisher="Altium Limited"
U2: library part SFH7072, "Sensor biométrico"
U4: "Non-inverting buck-boost / converter able to provide a regulated output voltage / from an input supply that can be higher or lower than / the output voltage"
Y1: library part CMP-1688-00008-1, "Ceramic SMD Crystal, 24 MHz, +/- 20 ppm, 50 Ohm, -20 to 70 degC, 4-Pin SMD, RoHS, Tape and Reel", Frequency="6 Hz", Max Operating Temperature="155 degC", Min Operating Temperature="-40 degC", Package Quantity=2500, ComponentLink1Description="Manufacturer URL", ComponentLink1URL=http://www.abracon.com/, ComponentLink2Description=Datasheet, ComponentLink2URL=http://www.abracon.com/Resonators/abm3b.pdf, Contact Material=Brass, Contact Plating=Gold, DatasheetVersion=Aug-15, Fastening Type=Snap, Height="1.244 mm", Impedance="50 Ohm", Length="2.6 mm", Mating Cycles=30, Mount="Surface Mount", PackageDescription="4-Pin Surface Mount Device, Body 5 x 3.2 mm", PackageReference=ABM3B, Packaging="Tape and Reel", Radiation Hardening=No, REACH SVHC=Unknown, RoHSCompliant=true, Weight="0.001058 oz", Width="3 mm"
Y2: library part XTAL, "Crystal Oscillator", LatestRevisionDate=17-Jul-2002, LatestRevisionNote="Re-released for DXP Platform.", PackageDescription="Crystal, Thru-Hole; 2 Leads; Body 3.1 x 8.2 mm (Dia.xH)", PackageReference=R38, Published=8-Jun-2000, Publisher="Altium Limited"

## Free pads (board coordinates)
  round 0 hole 1 mask+0.102: 14(1.3,1.3) 14(1.3,38.7) 14(38.7,1.3) 14(38.7,38.7)
  round 3 / inner round 0 / far side round 0 hole 1 mask+0.102: 14(4,2.3) 14(4,37.7) 14(36,2.3)

## Via types
v1: diameter 0.46, hole 0.2, Top Layer to Bottom Layer, 80 vias
v2: diameter 0.46, hole 0.2, Top Layer to Middle Layer, 36 vias
v3: diameter 0.3, hole 0.15, Top Layer to Middle Layer, 8 vias
v4: diameter 0.2, hole 0.2, Top Layer to Bottom Layer, 7 vias
v5: diameter 0.3, hole 0.3, Top Layer to Bottom Layer, 1 vias

## Nets (pads, with @x,y where several pads share a name; then routed paths per layer and width w, separated by ;. In a path a pad name is that pad's centre, name@x,y a point inside that pad or via, vN(x,y) a via of type N, cw(c..) or ccw(c..) an arc to the next point about the centre after c; other vN are vias at no path point)
CC_RESET: C11.1 J1.4 R3.1 S1.1 U3.19 | length 57.1
  Top Layer w0.2: S1.1 8.221,5.996 11.35,9.125 11.35,14.448 ; v1(7.1,14.4) 8.752,14.4 C11.1 11.35,14.448 ; v1(7.8,21.4) 5.954,21.4 J1.4 5.548,21.389 4.843,20.684 4.843,19.61 5.278,19.175 9.052,19.175 9.169,19.058 9.169,18.191 9.579,17.781 10.809,17.781 11.93,18.903 11.93,18.939 13.052,20.06 24.795,20.06 25.894,21.159 25.894,21.641 U3.19 ; R3.1 12.681,14.448 11.35,14.448
  Middle Layer w0.2: v1(7.1,14.4) 7.8,15.1 v1(7.8,21.4)
GND: B1.2 Buzz1.2 C1.2 C2.2 C3.2 C4.2 C5.2 C6.2 C7.2 C8.2 C9.2 C10.2 C21.2 C23.2 C24.2 C25.2 C26.2 C27.2 C28.1 C29.1 C30.2 C31.2 L3.1 L4.1 LED1,2.1 LED1,2.3 Q1.2 R2.1 R4.1 R7.1 U1.B4 U1.D1 U1.D5 U4.B2 U4.C2 U5.6 U5.7 U6.12 U6.13 U6.16 U7.1 U7.5 U7.7 | length 29.9
  Top Layer w0.1: v1(23.4,11.5) 25.1,11.5 25.8,12.2 25.8,13.577 26.407,14.184 U1.D5@26.775,14.184 ; U1.D1 30.658,14.199 31.161,14.702 C9.2
  Top Layer w0.2: 19.675,28.425 20.675,28.425 21.325,28.425 v1(22,29.1) ; U1.D5@26.775,14.184 U1.D5 U1.D5@26.803,14.199 ; R2.1 28.4,18.159 28.594,17.965 v1(28.594,17.905) ; U6.12 36.444,9.405 36.695,9.155 36.695,8.68 U6.16
  Middle Layer w0.1: v1(23.4,11.5) 23.4,11.87 24.929,13.399 v3(27.19,13.399)
  Middle Layer w0.2: v1@11.45,34.05 v1(11.5,34.1) ; v1@16.936,33.856 v1(16.986,33.806) ; v1(28.594,17.905) 29.122,17.905 29.897,18.68 31.145,18.68 31.5,18.325 v1(31.5,17.2)
  Bottom Layer w0.2: U4.C2 U4.B2 ; v1(21.149,2.37) 22.197,2.37 C31.2 ; v4(25.835,33.99) 25.91,34.065 25.91,34.915 U5.6 ; R4.1 29.496,30.282 29.496,30.721 29.625,30.85 29.85,30.85 v1(29.9,30.9)
  other v1: 10.915,2.277 30.1,2.9 1.6,3 38.9,3.4 9.4,5.1 7.3,5.2 22.3,6.7 25.8,8.5 2,8.7 4.7,8.7 7.4,8.7 17.363,8.788 39.1,9.4 19.6,11.3 38.833,14.8 19.6,15.6 38.3,18.6 9.9,32.4 2,35.4 6.5,38.3 12.168,38.31 16.6,38.4
  other v4: 24.785,33.99
GND1: C11.2 C12.2 C13.2 C14.2 C15.1 C16.1 C17.2 C19.1 C20.1 F1.1 J1.1 L3.2 L4.2 S1.2 U3.3 U3.33 Y1.2 Y1.4 | length 52.2
  Top Layer w0.1: C12.2@10.3,28.75 C12.2@10.435,28.885 ; v1@10.366,29.765 v1(10.435,29.834) ; C17.2 C17.2@13.561,19.097
  Top Layer w0.2: C12.2@10.435,28.885 v1(10.435,29.834) ; C17.2@13.561,19.097 v1(14.689,19.097) ; v4(26.653,24.051) 27.403,24.801 U3.3 27.403,27.069 28.151,27.817 28.7,28.366 v1(28.7,30.8) ; C19.1 C19.1@27.676,32.911 ; C20.1 32,34.01 32.929,34.939 F1.1
  Middle Layer w0.1: v1(14.689,19.097) v1@14.695,19.104 ; v1@14.695,21.91 v1(14.701,21.917)
  Middle Layer w0.2: v1(8.1,25.1) 6.435,26.765 v1(6.435,27.602) 8.203,27.602 v1(10.435,29.834) 13.813,29.834 v1(15.017,28.63) 15.052,28.665 17.265,28.665 v1(17.3,28.7) ; v1@14.695,19.104 v1@14.695,21.91 ; v1(19.3,34.1) 19.317,34.1 19.547,33.87 23.72,33.87 24.1,34.25 v1(24.1,37.8) 24.9,37.8 v1(27.2,35.5) ; v1(28.7,30.8) 28.7,32.396 27.2,33.896 v1(27.2,35.5) ; v1(30.628,35.585) 30.558,35.585 30.472,35.5 v1(27.2,35.5)
  other v4: 26.653,22.576 25.178,24.051 28.128,24.051 26.653,25.526
IN2_N: U1.B3 U2.10 | length 19
  Middle Layer w0.1: v1@26.7,11.975 27.59,12.865 v3(27.59,13.399)
  Middle Layer w0.2: v1(26.611,11.9) 26.625,11.9 v1@26.7,11.975
  Bottom Layer w0.2: v1@26.536,11.975 v1(26.611,11.9) 26.611,12.789 26.311,13.089 25.107,13.089 24.615,12.597 24.615,10.984 23.6,9.969 23.6,8.8 24.8,7.6 26.8,7.6 29.756,4.644 U2.10
IN2_P: U1.B2 U2.3 | length 21.4
  Middle Layer w0.1: v3(27.99,13.399) 29.401,13.399 29.75,13.05 v1(30.2,12.6)
  Bottom Layer w0.2: v1(30.2,12.6) 30.195,12.595 29.67,12.595 29.665,12.6 29.2,12.6 28.521,11.921 28.521,11.279 29.678,10.122 36.347,10.122 37.284,9.185 37.284,6.867 35.06,4.644 U2.3
IN_N: U1.A3 U2.2 | length 20.7
  Top Layer w0.1: U1.A3 27.59,12.21 28.5,11.3 v1(29.4,11.3)
  Bottom Layer w0.2: v1(29.4,11.3) 29.93,10.77 36.264,10.77 37.82,9.214 37.82,5.52 35.744,3.444 U2.2
IN_P: U1.A2 U2.1 | length 23.9
  Top Layer w0.1: U1.A2 27.99,12.36 28.55,11.8 29.9,11.8 v1(30.4,11.3)
  Bottom Layer w0.2: v1(30.4,11.3) 36.775,11.3 38.375,9.7 38.375,3.544 36.331,1.5 35.669,1.5 34.925,2.244 U2.1
JTAG_TCKC: J1.2 U3.14 | length 29.6
  Top Layer w0.2: J1.2 8.516,23.889 9.323,24.697 9.323,29.66 10.128,30.465 10.797,30.465 11.064,30.198 11.064,25.554 12.325,24.293 21.207,24.293 22.2,23.301 U3.14
JTAG_TMSC: J1.3 U3.13 | length 32.3
  Top Layer w0.2: J1.3 5.548,22.639 4.843,23.344 4.843,25.669 5.019,25.844 7.206,25.844 8.618,27.257 8.618,29.52 9.962,30.865 10.962,30.865 11.464,30.364 11.464,25.72 12.49,24.693 21.373,24.693 22.265,23.801 U3.13
NetBuzz1_3: Buzz1.3 R11.2 | length 4.7
  Top Layer w0.2: Buzz1.3@11.687,36.08 11.787,36.08 14.65,33.218 R11.2
NetC10_1: C10.1 U1.D2 | length 4.9
  Top Layer w0.2: C10.1 23.3,14.2 v2(24.1,14.2)
  Middle Layer w0.1: v2(24.1,14.2) 24.101,14.199 v3(27.99,14.199)
NetC15_2: C15.2 U3.4 Y2.1 | length 32.4
  Top Layer w0.2: C15.2@17.675,31.35 25.1,31.35 25.916,30.534 25.975,30.475 26.749,30.475 27.543,30.057 28.1,29.5 28.1,28.344 27.751,27.99 ; U3.4 26.903,27.135 27.311,27.542 27.751,27.99 ; v2(27.275,28.55) 27.751,28.074 27.751,27.99 ; v2(32.102,20.682) 32.116,20.668 32.632,20.668 32.775,20.525 32.775,17.3 Y2.1
  Middle Layer w0.2: v2(27.275,28.55) 27.3,28.525 30.383,28.525 31.125,27.783 31.125,26.175 32.095,25.205 32.095,20.689 v2(32.102,20.682)
NetC16_2: C16.2 TP3.1 U3.5 Y2.2 | length 29.7
  Top Layer w0.2: C16.2 13.45,27.298 14.173,26.575 14.198,26.6 20.5,26.6 22.3,28.4 25.466,28.4 25.599,28.266 26.158,27.708 ; U3.5 26.403,27.462 26.158,27.708 ; v2@26.6,28.15 26.158,27.708 ; v2(29.796,27.532) 30.402,26.925 TP3.1@32.425,26.925 ; TP3.1 TP3.1@32.425,26.925 ; v2(33.325,24.05) 32.4,24.975 32.4,26.9 TP3.1@32.425,26.925 ; v2(34.05,21.725) 34.062,21.713 34.062,20.412 Y2.2
  Middle Layer w0.2: v2(26.6,28.15) 27.218,27.532 v2(29.796,27.532) ; v2(33.325,24.05) 33.325,22.45 v2(34.05,21.725)
NetC17_1: C17.1 U3.12 | length 45.8
  Top Layer w0.2: C17.1 11.44,17.699 11.122,17.381 9.294,17.381 8.475,18.2 8.475,18.658 8.358,18.775 5.112,18.775 4.35,19.537 4.35,25.741 4.853,26.244 7.04,26.244 8.218,27.422 8.218,29.686 9.797,31.265 11.128,31.265 11.864,30.529 11.864,25.886 12.456,25.294 21.338,25.294 22.331,24.301 U3.12
NetC18_1: C18.1 C19.2 L6.2 | length 7
  Top Layer w0.2: L6.2 26.844,36.219 27.279,36.654 C18.1 28.906,35.706 27.625,34.425 C19.2 ; C19.2@27.705,33.876 C19.2@27.705,33.896
NetC18_2: C18.2 F1.2 | length 2.2
  Top Layer w0.2: C18.2 29.921,37.854 30.734,37.041
NetC20_2: C20.2 L5.2 L6.1 U3.1 | length 20.9
  Top Layer w0.2: L5.2 23.278,36.172 24.1,35.35 25.378,35.35 25.435,35.294 25.435,33.365 26.794,32.006 30.119,32.006 30.525,31.6 30.525,30.067 ; U3.1 28.403,26.938 30.525,29.059 30.525,30.067 ; C20.2 32,30.8 31.267,30.067 30.525,30.067
NetL2_2: L2.2 U3.17 | length 16
  Top Layer w0.2: L2.2 10.344,18.656 12.548,20.86 19.36,20.86 20.125,21.625 24.903,21.625 U3.17
NetL5_1: L5.1 U3.2 | length 14.3
  Top Layer w0.2: L5.1 22.65,35.302 22.65,34.366 25.416,31.6 28.903,31.6 29.321,31.183 29.321,28.421 28.035,27.135 27.903,27.003 U3.2
NetL7_1: L7.1 U4.B1 | length 3.7
  Bottom Layer w0.2: U4.B1 8.4,37.1 9.1,37.8 L7.1
NetL7_2: L7.2 U4.C1 | length 3.6
  Bottom Layer w0.2: U4.C1 8.4,36.7 8.8,36.3 10.6,36.3 L7.2
NetL8_2: L8.2 U5.2 | length 4.9
  Bottom Layer w0.2: U5.2 25.36,32.965 25.36,32.859 25.729,32.49 27.19,32.49 27.355,32.655 L8.2
NetLED1,2_2: LED1,2.2 R10.2 | length 4.5
  Top Layer w0.2: 20.675,29.825 20.75,29.9 24.9,29.9 25.075,30.075 R10.2@25.1,30.075
NetLED1,2_4: LED1,2.4 R9.2 | length 8.1
  Top Layer w0.2: 19.675,29.825 19.65,29.85 19.65,30.675 19.925,30.95 24.824,30.95 25.699,30.075 26.175,30.075 26.35,29.9 R9.2
"NetM1_2 +": "M1.2 +" Q1.3 | length 17.2
  Top Layer w0.5: 4.152,31.361 7.293,34.502 8.224,34.502 10.665,36.943 13.007,36.943 14.924,35.026 Q1.3
NetQ1_1: Q1.1 R8.2 | length 3.7
  Top Layer w0.2: Q1.1 18.76,36.245 20.149,34.856 R8.2
NetR1_1: R1.1 R2.2 U1.F1 | length 7.1
  Top Layer w0.1: U1.F1 28.8,14.999 30.096,16.295 30.096,16.671 v2(30.1,16.675)
  Top Layer w0.2: R2.2 28.45,19.559 29.15,19.559 29.725,18.984 29.925,18.984 30.1,18.809 30.1,18.759 29.775,18.434 v2(29.771,17.804)
  Middle Layer w0.2: v2(29.771,17.804) 29.771,17.075 30.1,16.745 v2(30.1,16.675)
NetR1_2: R1.2 U3.26 | length 3.7
  Top Layer w0.2: U3.26 29.228,22.801 29.404,22.726 29.639,22.491 ccw(c30.392,23.037) 29.718,22.396 30.1,21.994 R1.2
NetR4_2: R4.2 R5.1 U4.D2 | length 29.9
  Middle Layer w0.2: v1(5.825,35.55) 10.475,30.9 v1(27.3,30.9)
  Bottom Layer w0.2: v1(5.825,35.55) 6.575,36.3 U4.D2 ; v1(27.3,30.9) 27.775,30.425 27.927,30.425 28.045,30.308 28.045,29.834 28.622,29.257 R4.2 31.463,29.257 R5.1
NetR6_1: R6.1 R7.2 U5.4 | length 9.5
  Middle Layer w0.2: v1(20.4,38.3) 23.5,35.2 v1(23.5,34.4)
  Bottom Layer w0.2: R7.2 18.964,37.833 19.51,37.833 19.978,38.3 v1(20.4,38.3) ; R6.1 20.39,37.261 v1@20.39,38.29 ; v1(23.5,34.4) 24.065,34.965 U5.4 24.66,35.04 U5.4@24.61,35.09
NetR8_1: R8.1 U3.15 | length 18.9
  Top Layer w0.2: v2(19.025,27.3) 17.75,27.3 16.2,28.85 16.2,31.75 16.775,32.325 20.114,32.325 R8.1 ; v2(20.525,23.725) 20.545,23.745 21.19,23.745 22.134,22.801 U3.15
  Middle Layer w0.2: v2(19.025,27.3) 19.025,25.225 v2(20.525,23.725)
NetR9_1: R9.1 U3.20 | length 17.8
  Top Layer w0.2: v2(23.291,19.286) 24.586,19.286 26.403,21.103 U3.20 ; R9.1 26.925,29.025 27.138,29.238 27.513,29.238 v2(27.563,29.288)
  Middle Layer w0.2: v2(23.291,19.286) 23.291,21.416 24.675,22.8 24.675,26.759 24.675,26.842 26.21,28.509 26.989,29.288 v2(27.563,29.288)
NetR10_1: R10.1 U3.16 | length 12.2
  Top Layer w0.2: v1(21.2,22.5) 21.27,22.5 21.47,22.301 U3.16 ; v1(23.3,29.1) 24.825,29.1 R10.1
  Middle Layer w0.2: v1(21.2,22.5) 21.2,27 v1(23.3,29.1)
NetR11_1: R11.1 U3.10 | length 19.2
  Top Layer w0.2: R11.1 15.242,32.343 12.664,29.764 12.664,26.217 12.781,26.1 21.663,26.1 22.462,25.301 U3.10
NetTP1_1: TP1.1 U3.23 | length 16.2
  Top Layer w0.2: v2(26.935,18.9) 26.935,19.719 27.903,20.687 U3.23 ; v2(32.05,16.675) 32.104,16.675 32.429,16.35 35.181,16.35 35.506,16.675 37.537,16.675 TP1.1
  Middle Layer w0.2: v2(26.935,18.9) 29.068,18.9 29.248,19.08 31.31,19.08 32.05,18.34 v2(32.05,16.675)
NetTP2_1: TP2.1 U3.31 Y1.3 | length 44.2
  Top Layer w0.2: v2(14.725,23.475) 15.431,22.769 16.294,22.769 Y1.3 ; U3.31 30.249,25.301 31.7,23.85 32.691,23.85 33.607,22.933 ; v2(32.625,21.975) 33.583,22.933 33.607,22.933 ; TP2.1 37.608,22.199 37.491,22.316 34.224,22.316 33.607,22.933
  Middle Layer w0.2: v2(14.725,23.475) 14.725,24.825 19.967,30.067 31.357,30.067 33.876,27.548 33.876,25.601 32.625,24.35 v2(32.625,21.975)
NetU1_E1: U1.E1 U3.27 | length 11.5
  Top Layer w0.1: U1.E1@28.4,14.587 28.812,14.587 v2(30.925,16.7)
  Top Layer w0.2: U3.27@29.228,23.301 U3.27 29.063,23.291 29.404,23.291 ; v2(30.925,18.15) 30.925,21.77 29.404,23.291 ; 29.404,23.291 29.228,23.291 29.404,23.291
  Middle Layer w0.2: v2(30.925,16.7) v2(30.925,18.15)
NetU1_E2: U1.E2 U3.22 U6.7 | length 21.4
  Top Layer w0.2: v2(26.269,17.984) 26.269,18.749 26.075,18.943 26.075,19.637 27.403,20.965 U3.22 ; U6.7 36.245,12.716 36.533,13.004 v2(36.533,13.074)
  Middle Layer w0.1: v2(26.269,17.984) 26.269,17.325 27.99,15.603 v3(27.99,14.599) 32.776,14.599 33.4,13.975 33.4,13.095 34.645,11.85 35.745,11.85 36.533,12.638 v2(36.533,13.074)
NetU1_E3: U1.E3 U3.8 | length 18.8
  Top Layer w0.2: v2(22.7,27.225) 23.475,26.451 U3.8
  Middle Layer w0.1: v2(22.7,27.225) 22.7,27.188 22.95,26.938 22.95,24.671 22.582,24.303 22.582,18.168 24.625,16.125 26.864,16.125 27.58,15.409 v3@27.58,14.6
  other v3: 27.59,14.599
NetU1_F2: U1.F2 U3.21 U6.6 | length 23.7
  Top Layer w0.1: v2(25.45,16.7) 26.155,16.7 26.43,16.975 29.025,16.975 29.2,16.8 29.2,16.35 v2(28.875,16.025) 28.371,15.996 28,15.625 U1.F2@28,15
  Top Layer w0.2: v2(25.45,17.95) 25.45,19.584 26.903,21.038 U3.21 ; U6.6 36.745,12.132 v2(37.165,12.552)
  Middle Layer w0.2: v2(25.45,16.7) v2(25.45,17.95) ; v2(28.875,16.025) 29.202,15.838 29.75,15.524 30.142,15.3 33.092,15.3 33.094,15.302 33.329,15.302 34.731,13.9 36.6,13.9 37.165,13.335 v2(37.165,12.552)
NetU1_F3: U1.F3 U3.25 U6.4 | length 26
  Top Layer w0.1: U1.F3@27.58,15 27.58,15.855 28.22,16.495 v2(28.293,16.495)
  Top Layer w0.2: v2(27.5,18.002) 27.5,19.708 28.001,20.209 29.034,20.209 29.7,20.875 29.7,21.829 29.228,22.301 U3.25 ; v2(36.3,14.7) 37.575,14.7 39.05,13.225 39.05,10.9 38.55,10.4 37.538,10.4 U6.4
  Middle Layer w0.2: v2(27.5,18.002) 28.293,17.209 v2@28.293,16.512 ; v2(28.293,16.495) v2@28.293,16.512 ; v2(36.3,14.7) 35.332,14.7 33.968,16.064 29.944,16.064 29.574,16.434 29.515,16.492 28.929,16.552 ccw(c28.875,16.025) 28.75,16.54 28.636,16.512 28.47,16.512 v2@28.293,16.512
NetU1_F4: U1.F4 U3.9 | length 19.1
  Top Layer w0.1: v2(22.025,16.525) 22.801,15.749 25.615,15.749 26.901,15.749 27.19,15.46 U1.F4
  Top Layer w0.2: v2(22.05,26.9) 23.149,25.801 U3.9
  Middle Layer w0.2: v2(22.025,16.525) 22.129,22.637 ccw(c21.599,22.646) 22.129,22.656 v2(22.05,26.9)
NetU3_6: U3.6 U7.4 | length 41
  Top Layer w0.2: v1(24.664,27.823) 25.477,27.823 25.903,27.397 U3.6
  Bottom Layer w0.2: v1(24.664,27.823) 28.252,27.823 30.775,25.3 30.775,23.8 25.569,18.594 25.569,14.199 24.215,12.845 24.215,11.15 22.7,9.634 22.7,7.296 23.196,6.8 26.7,6.8 28.4,5.1 28.4,4.152 27.141,2.893 U7.4
NetU3_7: U3.7 U7.2 | length 40.9
  Top Layer w0.2: v1(23.6,27.4) 24.334,27.4 24.536,27.198 24.931,27.198 25.133,26.997 25.403,26.997 U3.7
  Bottom Layer w0.2: v1(23.6,27.4) 18.3,22.1 18.3,15.489 21.8,11.989 21.8,8.5 18.223,4.923 18.223,2.188 19.121,1.29 24.745,1.29 25.241,1.786 25.241,1.81 U7.2
NetU3_24: U3.24 U6.8 | length 15.9
  Top Layer w0.2: U3.24 28.403,21.072 v1(28.725,20.75) ; v1(35.418,12.918) 35.418,12.847 35.745,12.52 U6.8
  Bottom Layer w0.2: v1(28.725,20.75) 30.415,19.06 30.415,13.785 31.282,12.918 v1(35.418,12.918)
NetU3_30: U3.30 Y1.1 | length 22.2
  Top Layer w0.2: Y1.1 18.775,18.7 20.576,18.7 21.901,17.375 29.12,17.375 29.221,17.274 30.824,17.274 31.525,17.975 31.525,23.457 30.193,24.789 30.193,24.791 29.063,24.791 U3.30
TX2: U1.E5 U2.6 | length 14.1
  Top Layer w0.1: v1(25.32,12.552) 25.327,12.559 25.327,13.872 26.054,14.599 U1.E5
  Bottom Layer w0.2: v1(25.32,12.552) 25.327,12.546 25.327,11.373 25.716,10.984 27.816,10.984 29.366,9.434 32.669,9.434 33.859,8.244 U2.6
TX3: U1.E4 U2.8 | length 24.2
  Middle Layer w0.1: v1(25.3,10.5) 24.1,10.5 22.6,9 21.4,9 20.3,10.1 20.3,12.635 22.665,15 25.645,15 26.045,14.599 v3(27.19,14.599)
  Bottom Layer w0.2: v1(25.3,10.5) 27.145,10.5 30.601,7.044 U2.8
TX4: U1.C5 U2.9 | length 13.2
  Top Layer w0.1: v1(25.3,9.5) 26,9.5 26.3,9.8 26.3,10.874 26.1,11.074 26.1,11.975 26.1,13.225 26.649,13.774 26.765,13.774 U1.C5
  Bottom Layer w0.2: v1(25.3,9.5) 26.548,9.5 30.204,5.844 U2.9
TX_SUP: C1.1 C2.1 C3.1 C4.1 C26.1 C27.1 J1.5 R3.2 R6.2 U1.F5 U2.4 U2.5 U2.7 U3.18 U3.28 U5.5 | length 143.1
  Top Layer w0.1: C2.1@20.1,14.102 C2.1 ; C2.1@20.15,14.075 20.556,14.481 20.579,14.481 21.547,15.449 26.375,15.449 26.79,15.034 U1.F5
  Top Layer w0.2: J1.5 6.338,20.139 6.643,19.834 6.643,19.692 6.76,19.575 9.254,19.575 9.569,19.26 9.569,18.357 9.745,18.181 10.643,18.181 11.53,19.069 11.53,19.104 12.886,20.46 22.124,20.46 22.582,20.919 24.059,20.919 v1(24.091,20.886) 24.915,20.886 25.328,21.3 25.328,21.387 25.403,21.462 U3.18 ; R3.2 12.771,13.663 13.365,13.069 13.365,12.228 ; C4.1 13.365,12.228 ; 16.176,7.332 16.351,7.157 ; C3.1@19.336,7.157 C3.1 20.771,7.188 22.6,5.359 22.6,2.764 22.764,2.6 v1(29.3,2.6) ; v1(19.8,16.8) 18.3,16.8 17.2,15.7 C1.1 ; C2.1@20.1,14.102 C1.1 ; U3.28 29.599,23.801 30.355,23.045 v2(30.4,23.045) ; 13.365,12.228 14.178,12.228 15.975,14.025 17.123,14.025 C1.1
  Top Layer w0.5: C4.1 16.351,7.157 C3.1@19.336,7.157 ; 16.176,7.332 v1(16.176,9.981)
  Middle Layer w0.2: v1(24.091,20.886) 25.077,21.872 25.077,22.102 26.025,23.05 30.395,23.05 v2(30.4,23.045)
  Bottom Layer w0.2: v1(16.176,9.981) 14.219,9.981 12.7,11.5 12.7,22.8 21.1,31.2 21.1,34.4 22.494,35.794 25.31,35.794 ; v1(19.8,16.8) 23.837,20.837 24.042,20.837 v1(24.091,20.886) ; R6.2 22.118,36.402 22.723,37.007 C26.1 25.229,37.03 C27.1 25.31,36.949 25.31,35.794 ; U5.5 25.31,35.794 ; v1(29.3,2.6) 29.33,2.57 29.33,2.07 30.2,1.2 32.133,1.2 32.659,1.726 32.659,5.654 33.198,6.194 ; U2.7 32.156,8.244 32.659,7.741 32.659,6.733 33.198,6.194 ; U2.5 U2.4 33.559,6.194 33.198,6.194
V2V1: C22.1 C22.2 C23.1 C24.1 C28.2 C29.2 C30.1 C31.1 L1.1 R5.2 U4.D1 U6.1 U6.14 U7.3 U7.6 U7.8 | length 125.3
  Top Layer w0.2: v2(31.568,7.418) 32.546,8.396 32.868,8.396 ; U6.14 35.745,7.68 36.075,7.35 36.075,6.34 36.063,6.328 C28.2 C28.2@35.997,6.262 ; U6.1 37.533,7.583 37.775,7.34 C29.2
  Top Layer w0.5: v1(32.025,11.925) 32.025,9.239 32.868,8.396 35.232,6.032 ; L1.1 L1.1 33.6,4.4 35.232,6.032 ; L1.1@32.75,4.423 L1.1@32.929,4.602 ; C28.2@35.997,6.262 35.462,6.262 35.232,6.032 ; C28.2@36.063,6.328 37.763,6.328 C29.2
  Middle Layer w0.2: v1(9.476,8.681) 16.514,1.644 27.837,1.644 v1(28.2,2.007) 28.2,4.05 v2(31.568,7.418)
  Bottom Layer w0.2: C23.1 5.627,33.727 6.638,34.737 ; U4.D1 7.3,35.4 6.638,34.737 ; v1(9.476,8.681) 9.476,31.899 6.638,34.737 ; C30.1 C31.1 22.2,3.85 22.86,4.51 U7.8 24.7,4.469 24.7,3.6 24.99,3.31 26.341,3.31 ; U7.6 26.341,3.31 ; v1(28.2,2.007) 28.2,1.417 28.083,1.3 26.517,1.3 26.4,1.417 26.4,2.051 U7.3 26.341,3.31 ; R5.2 32.215,30.115 32.458,30.358 ; v1(32.025,11.925) 36.765,11.925 36.765,13.235 35.7,14.3 33.07,14.3 C22.1@33.067,14.303 ; C24.1 32.7,31.673 32.7,30.6 32.458,30.358 ; C22.2@33.067,15.557 33.094,15.53 C22.1 ; C22.2 33.094,21.627 33.55,22.083 33.55,29.265 32.458,30.358
V2V1_filt: C5.1 C6.1 C7.1 C8.1 C12.1 C13.1 C14.1 L1.2 L2.1 U1.A4 U1.C1 U3.29 U3.32 | length 95.8
  Top Layer w0.1: U1.A4 27.2,12.989 27.2,11.7 28.8,10.1 C7.1 30.443,8.943 31.1,9.6 31.1,10.673 31.114,10.687 31.114,13.086 30.4,13.8 29.052,13.8 29.051,13.799 U1.C1
  Top Layer w0.2: L2.1 10.212,19.525 10.212,20.701 9.456,21.457 9.456,22.735 10.212,23.491 C13.1 ; C12.1 10.212,27.194 C13.1 ; v1(11.9,22.8) 11.9,23.46 11.852,23.508 ; C14.1 11.852,23.508 ; v1(15.169,11.722) 15.196,11.696 16.2,11.696 18.631,9.265 22.865,9.265 24.25,7.88 C5.1 ; C6.1@27.163,5.514 C6.1 27.2,5.552 27.222,5.574 27.222,8.943 C7.1 ; U3.29 29.929,24.301 v2(30.461,23.769) ; U3.32 29.063,25.81 29.581,25.81 29.771,26 v2(29.825,26) ; L1.2 32.765,5.566 v2(32.765,6.652) ; C13.1 10.219,23.508 11.852,23.508
  Top Layer w0.5: C5.1 24.263,5.514 C6.1@27.163,5.514 ; C6.1@27.2,5.552 30.025,5.552 C8.1 30.063,5.564 32.737,5.564 L1.2
  Middle Layer w0.2: v1(11.9,22.8) 11.9,14.991 v1(15.169,11.722) ; v2(29.825,26) 30.461,25.364 v2(30.461,23.769) 31.213,23.769 31.422,23.56 31.422,20.265 32.775,18.913 35.087,18.913 35.9,18.1 35.9,16.192 38.312,13.779 38.312,12.2 v2(32.765,6.652)
VBAT: B1.1 Buzz1.1 C9.1 C21.1 C25.1 L8.1 M1.1 U1.C4 U3.11 U4.A1 U4.A2 U5.1 U5.3 | length 157.9
  Top Layer w0.1: v1(31.495,13.98) 32.275,13.2 33.752,13.2 C9.1
  Top Layer w0.2: v1(9.75,33.739) 12.264,31.225 12.264,26.051 12.615,25.7 21.497,25.7 22.397,24.801 U3.11
  Top Layer w0.5: M1.1 2.094,31.803 2.094,30.906 3.4,29.6 4.9,29.6 9.039,33.739 v1(9.75,33.739) ; Buzz1.1@8.225,36 Buzz1.1 8.425,36 8.425,36.2 8.443,36.218 v1(8.443,38.257)
  Middle Layer w0.1: v1(20.893,10.593) 21.393,10.593 24.599,13.799 v3(27.19,13.799) 31.217,13.799 31.398,13.98 v1(31.495,13.98)
  Middle Layer w0.5: v1(8.443,38.257) 9.75,36.95 v1(9.75,33.739)
  Bottom Layer w0.2: U4.A2 7.1,37.5 ; U4.A1 7.1,37.5 ; v1(8.443,38.257) 7.857,38.257 7.1,37.5 ; B1.1@15.296,3.527 B1.1 ; 23.613,31.968 23.651,31.93 ; U5.1 25.96,33.09 26.06,33.19 26.087,33.19 27.866,34.968 27.866,36.598 C25.1 C25.1@28.222,36.931 ; 29.211,35.942 29.234,35.942 ; L8.1@30.029,34.767 L8.1@30.192,34.93
  Bottom Layer w0.5: C21.1 11.115,3.527 ; v1(9.75,33.739) 9.75,33.663 11.115,32.298 11.115,3.527 ; B1.1@15.296,3.527 11.115,3.527 ; B1.1 15.733,5.144 19.741,9.152 19.741,9.441 ; v1(20.893,10.593) 19.741,9.441 ; U5.3 23.613,31.968 22.81,31.165 ; C25.1@28.222,36.931 29.211,35.942 ; 29.234,35.942 29.689,35.487 29.689,34.78 30.017,34.78 L8.1@30.029,34.767 ; L8.1@30.915,34.638 31.471,34.638 31.764,34.345 31.764,32.34 31.203,31.78 31.179,31.78 31,31.6 26.6,31.6 24.975,29.975 23.999,29.975 22.81,31.165 ; 19.741,9.441 18.5,10.682 18.5,11.8 16.493,13.807 16.493,24.848 22.81,31.165
pads on no net: J1.MP1 J1.MP2 U1.A1 U1.A5 U1.B1 U1.B5 U1.C2 U1.C3 U1.D3 U1.D4 U2.11 U2.12 U6.2 U6.3 U6.5 U6.9 U6.10 U6.11 U6.15
copper on no net: | length 3.2
  Top Layer w0.2: 30.75,37.039 v5@33.92,37.039
  other v1: 6.1,2.5 4.7,5.2 14.7,5.5 34.9,7.7 22,13.1 35.6,20.8
  other v5: 33.926,37.039

## Polygon pours and split planes (outlines as drawn)
GND1 on Top Layer "GND1_L01_P002" (solid, pour order 2): 0.9,11 14.5,11 15.7,12.2 15.7,17.1 27.3,17.1 27.6,17.4 27.6,20.384 39.384,20.384 39.4,20.4 39.376,20.424 39.376,27.211 19.389,27.211 18.531,28.069 18.531,30.6 39.367,30.6 39.4,30.633 39.4,39.3 18.961,39.3 18.8,39.139 18.8,32.9 16.3,32.9 12.8,29.4 1,29.4
GND on Top Layer "GND_L01_P010" (solid, pour order 10): 0.9,10.7 0.65,10.45 0.65,0.65 39.35,0.65 39.4,0.7 39.4,19.95 27.55,19.95 24.5,16.9 16,16.9 16,11.9 14.8,10.7
GND on Top Layer "GND_L01_P003" (solid, pour order 3): 1,30 8,30 8,30.006 9.694,31.7 14,31.7 14,33 14.3,33.3 18.6,33.3 18.6,39.227 18.603,39.23 18.534,39.3 1,39.3
GND on GND "GND_L03_P008" (solid, pour order 8): 0.7,39.3 39.4,39.3 39.4,0.6 0.7,0.6 0.6,0.7 0.7,0.8
GND on Bottom Layer "GND_L04_P009" (solid, pour order 9): 0.7,39.3 39.4,39.3 39.4,0.6 0.7,0.6 0.65,0.65 0.7,0.7
GND on Middle Layer "GND_L02_P004" (solid, pour order 4): 0.7,39.3 39.4,39.3 39.4,0.6 39.3,0.7 0.6,0.7 0.6,39.2

## Silkscreen, mask and mechanical layers (free items; w line width, h text height)
Top Overlay:
  drawing of 2 lines, arcs and shapes, not listed